# Altium PCB cw312_xc7a35t.PcbDoc (part 1 of 2)
Units mil, origin at the board's own origin, x right, y up, seen from the top; angles counter-clockwise.
Board outline 2310.04 x 2113.83 mil, 4 copper layers (Top Layer, Layer 1, Layer 2, Bottom Layer), stack 23.756 mil thick; 64 components, 69 nets, 577 pads, 221 vias.
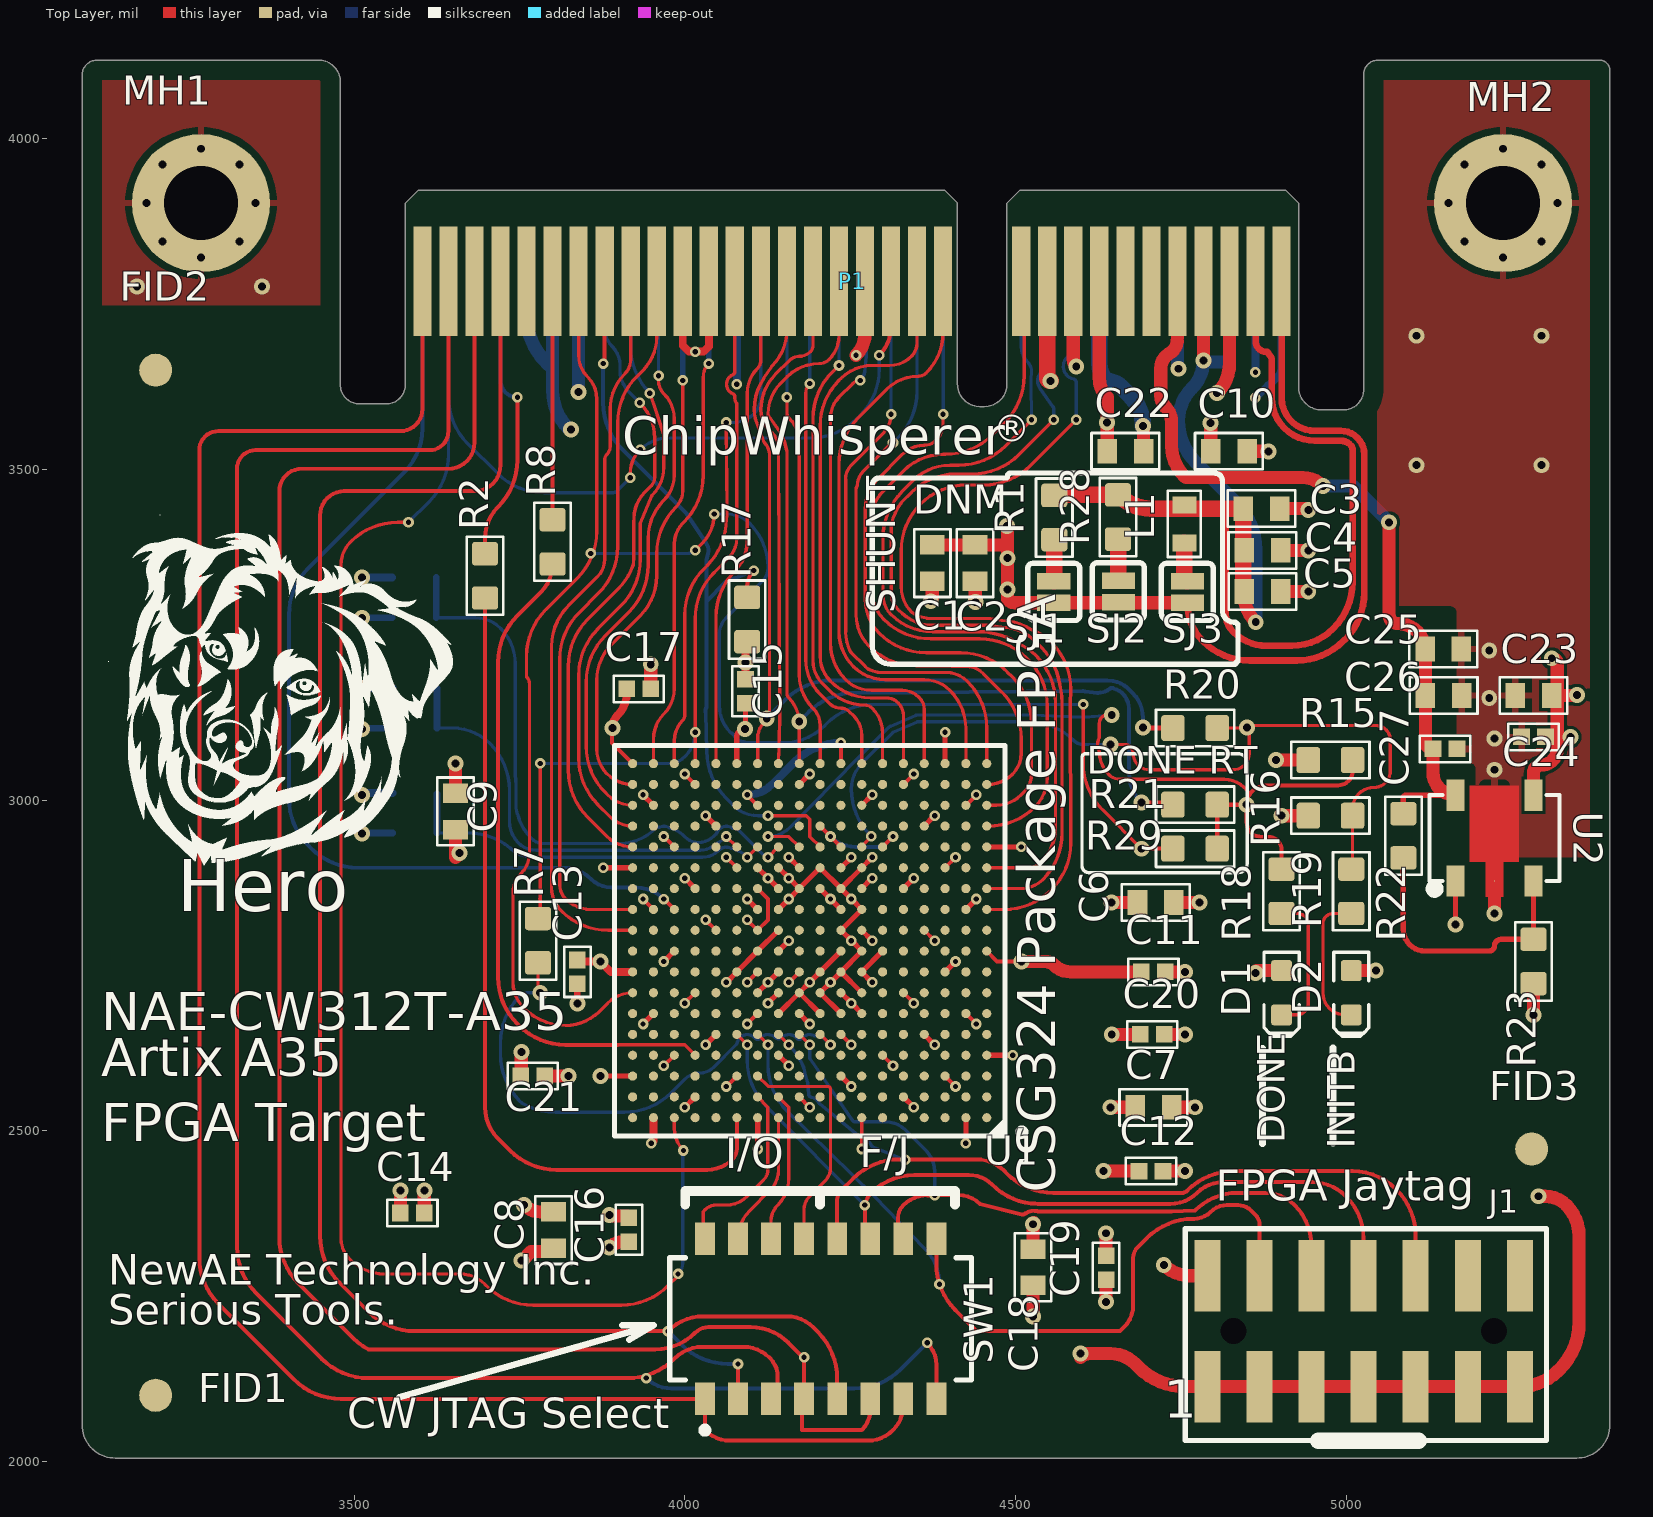
[diagram p0: Top Layer view]
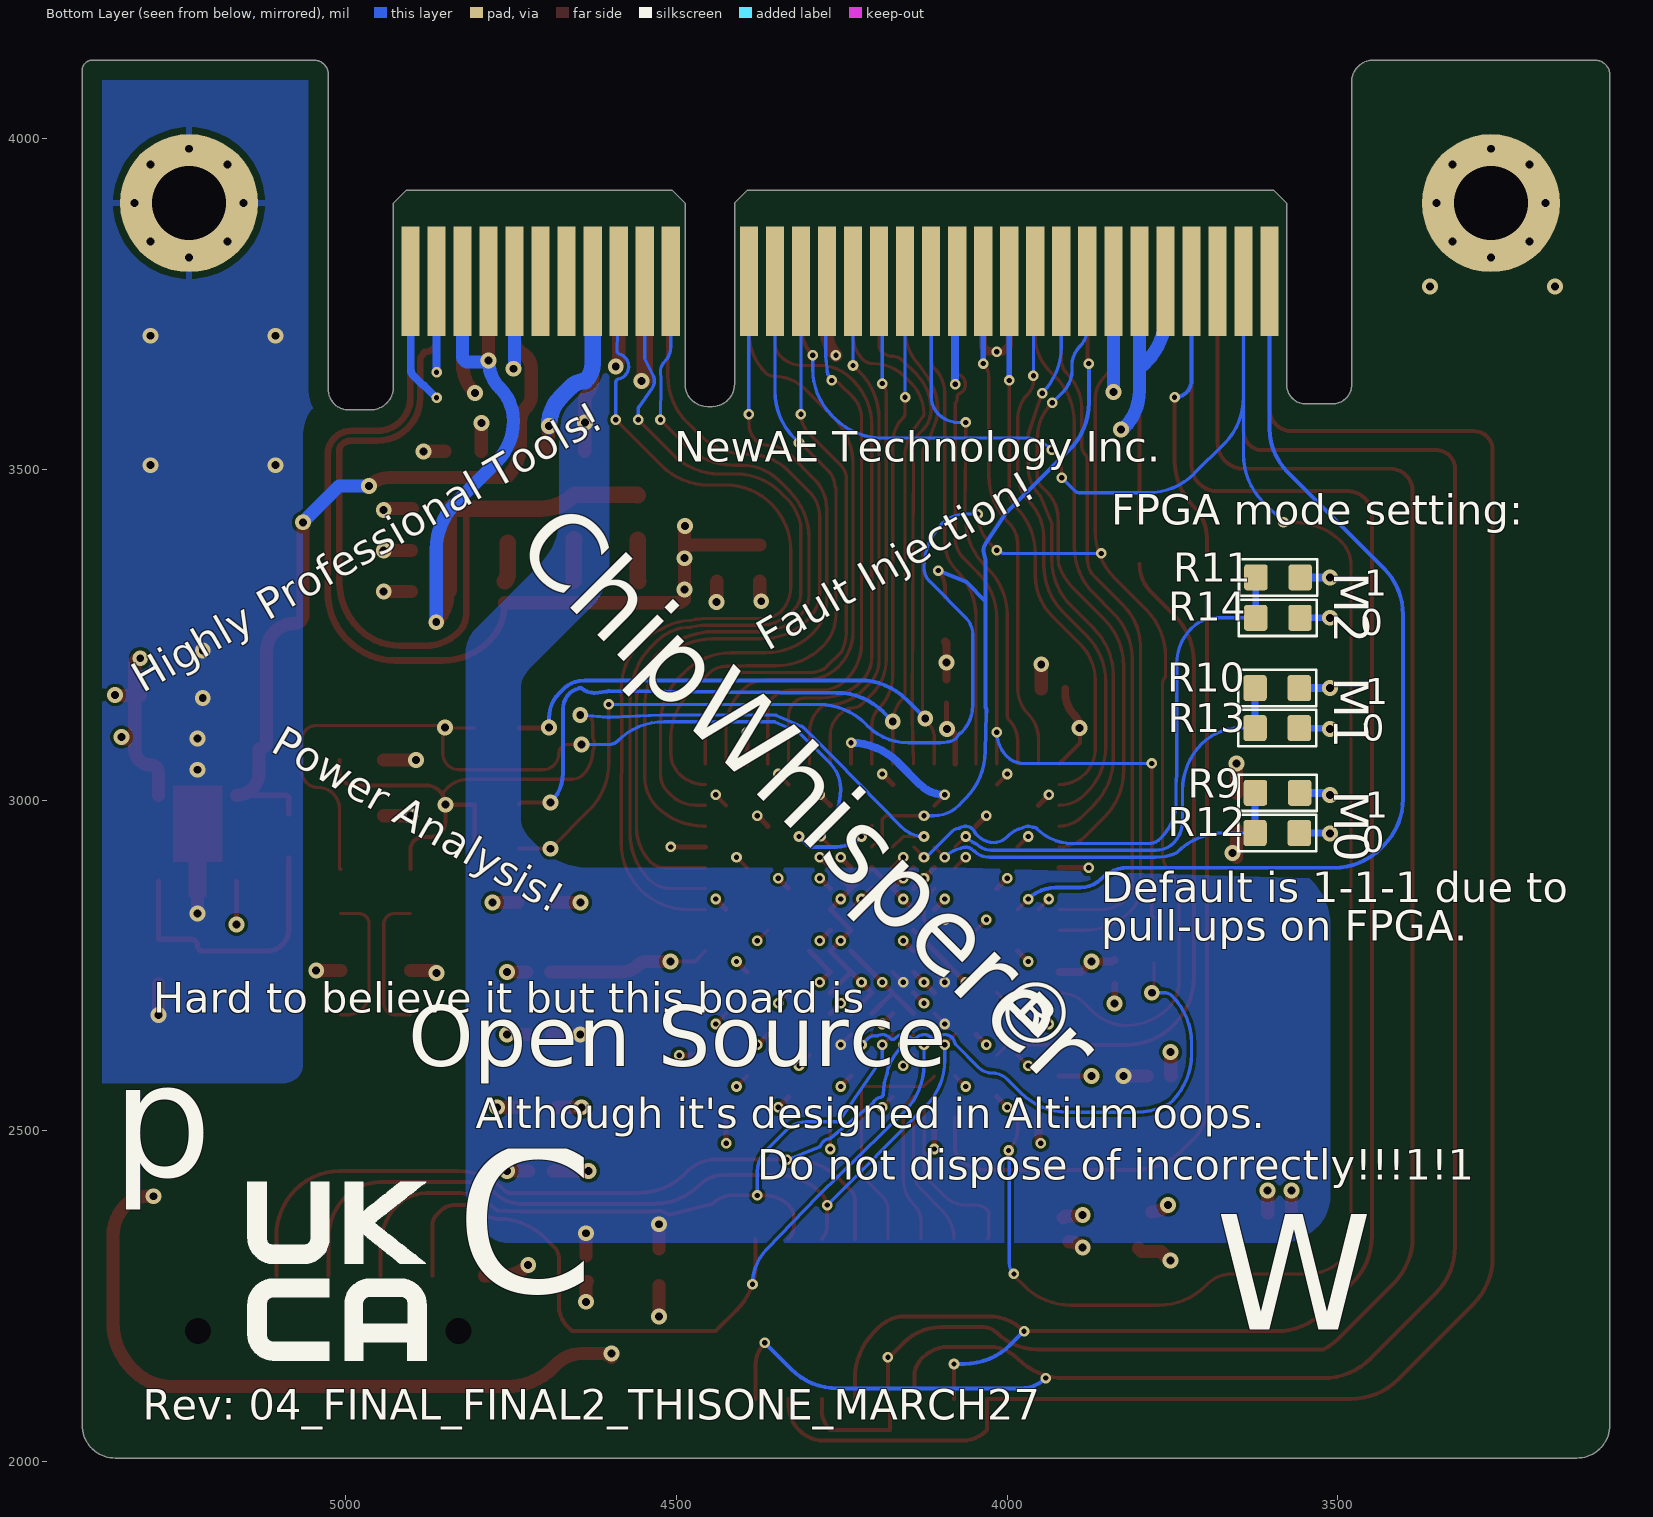
[diagram p1: Bottom Layer view, seen from below]
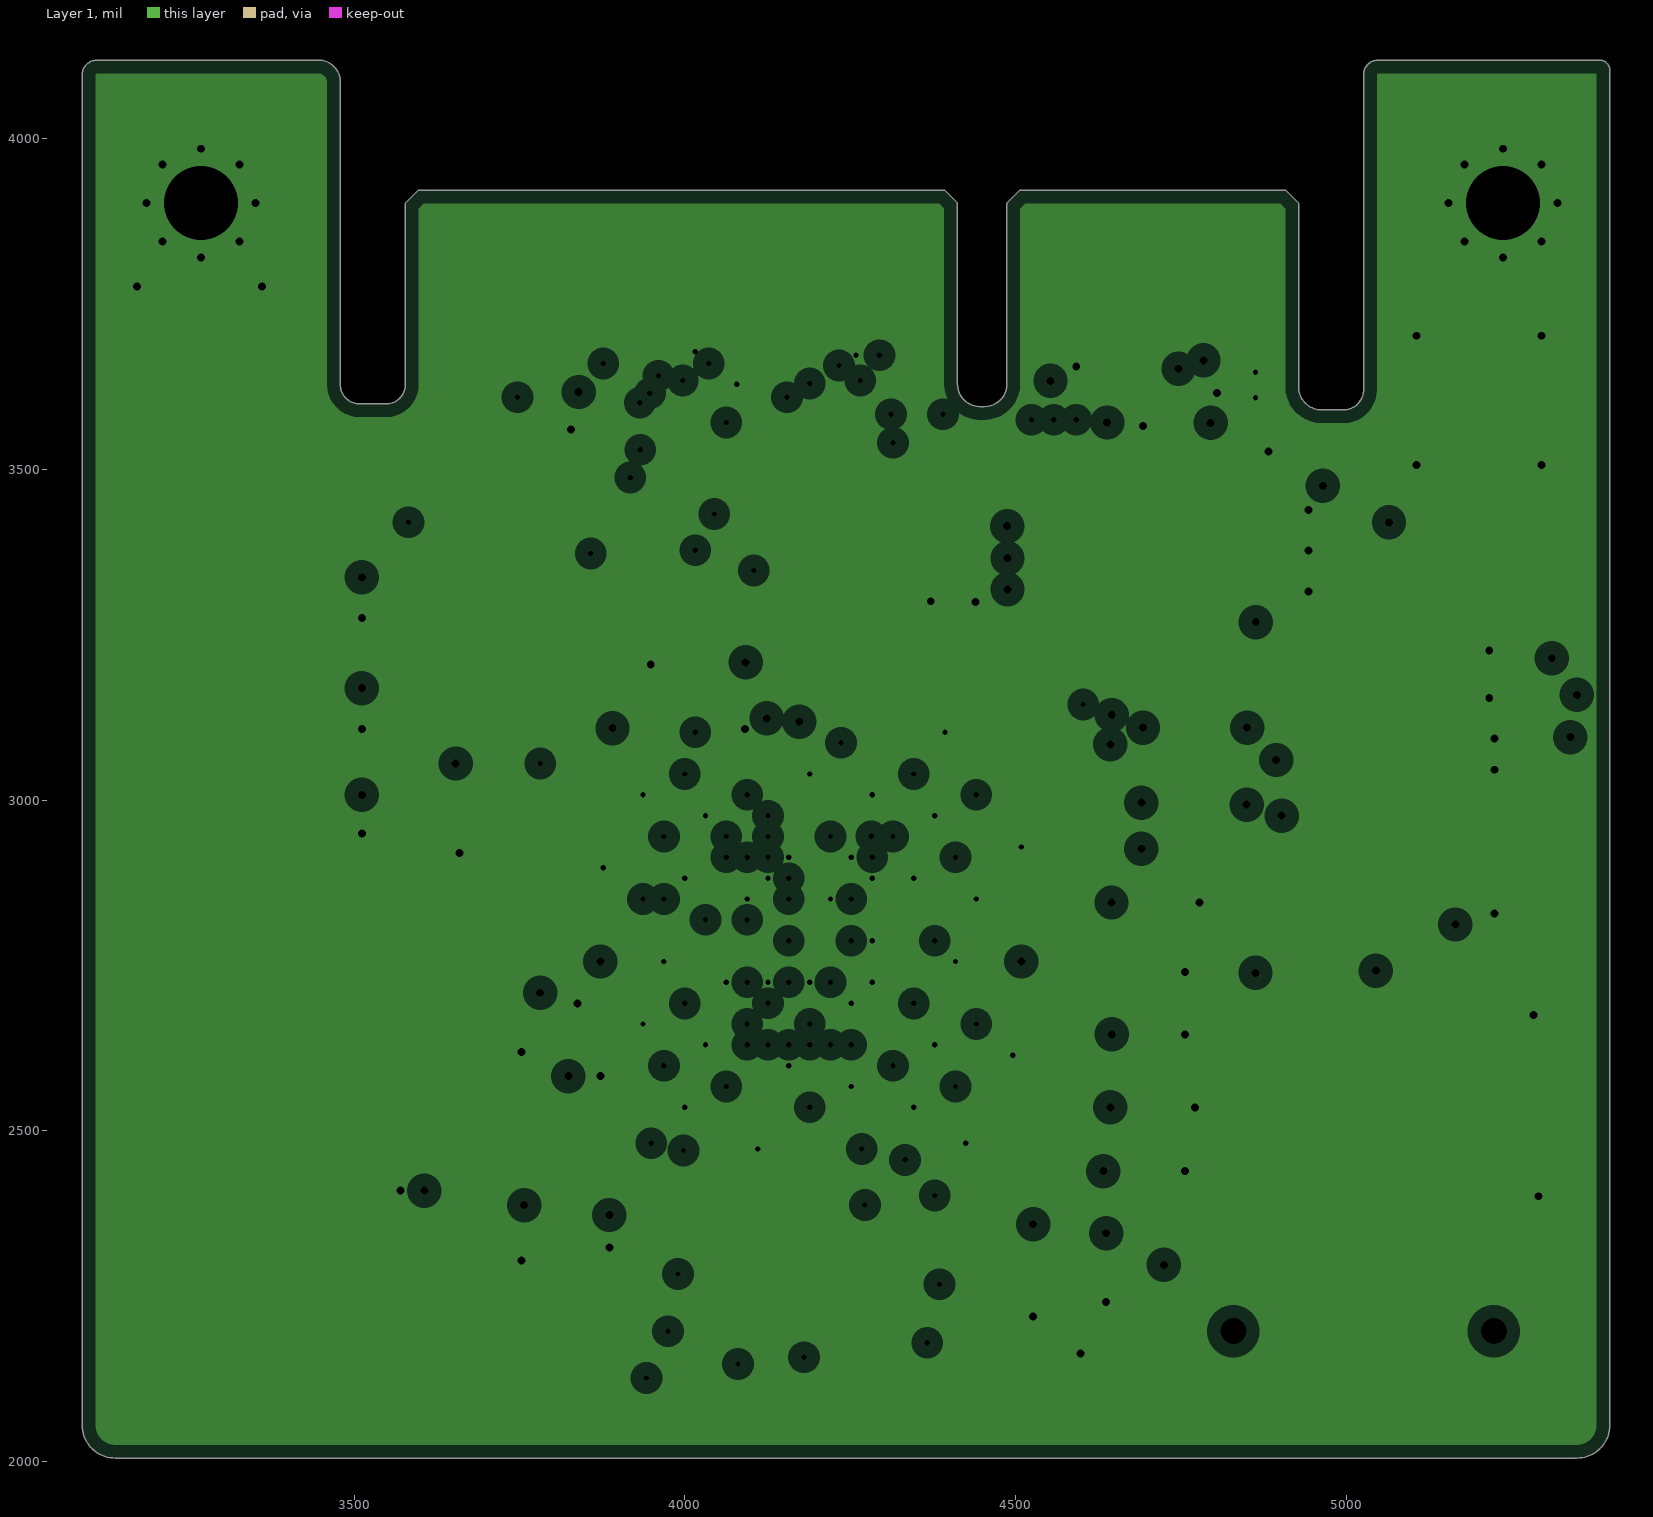
[diagram p2: Layer 1, clearances drawn from the general rule]
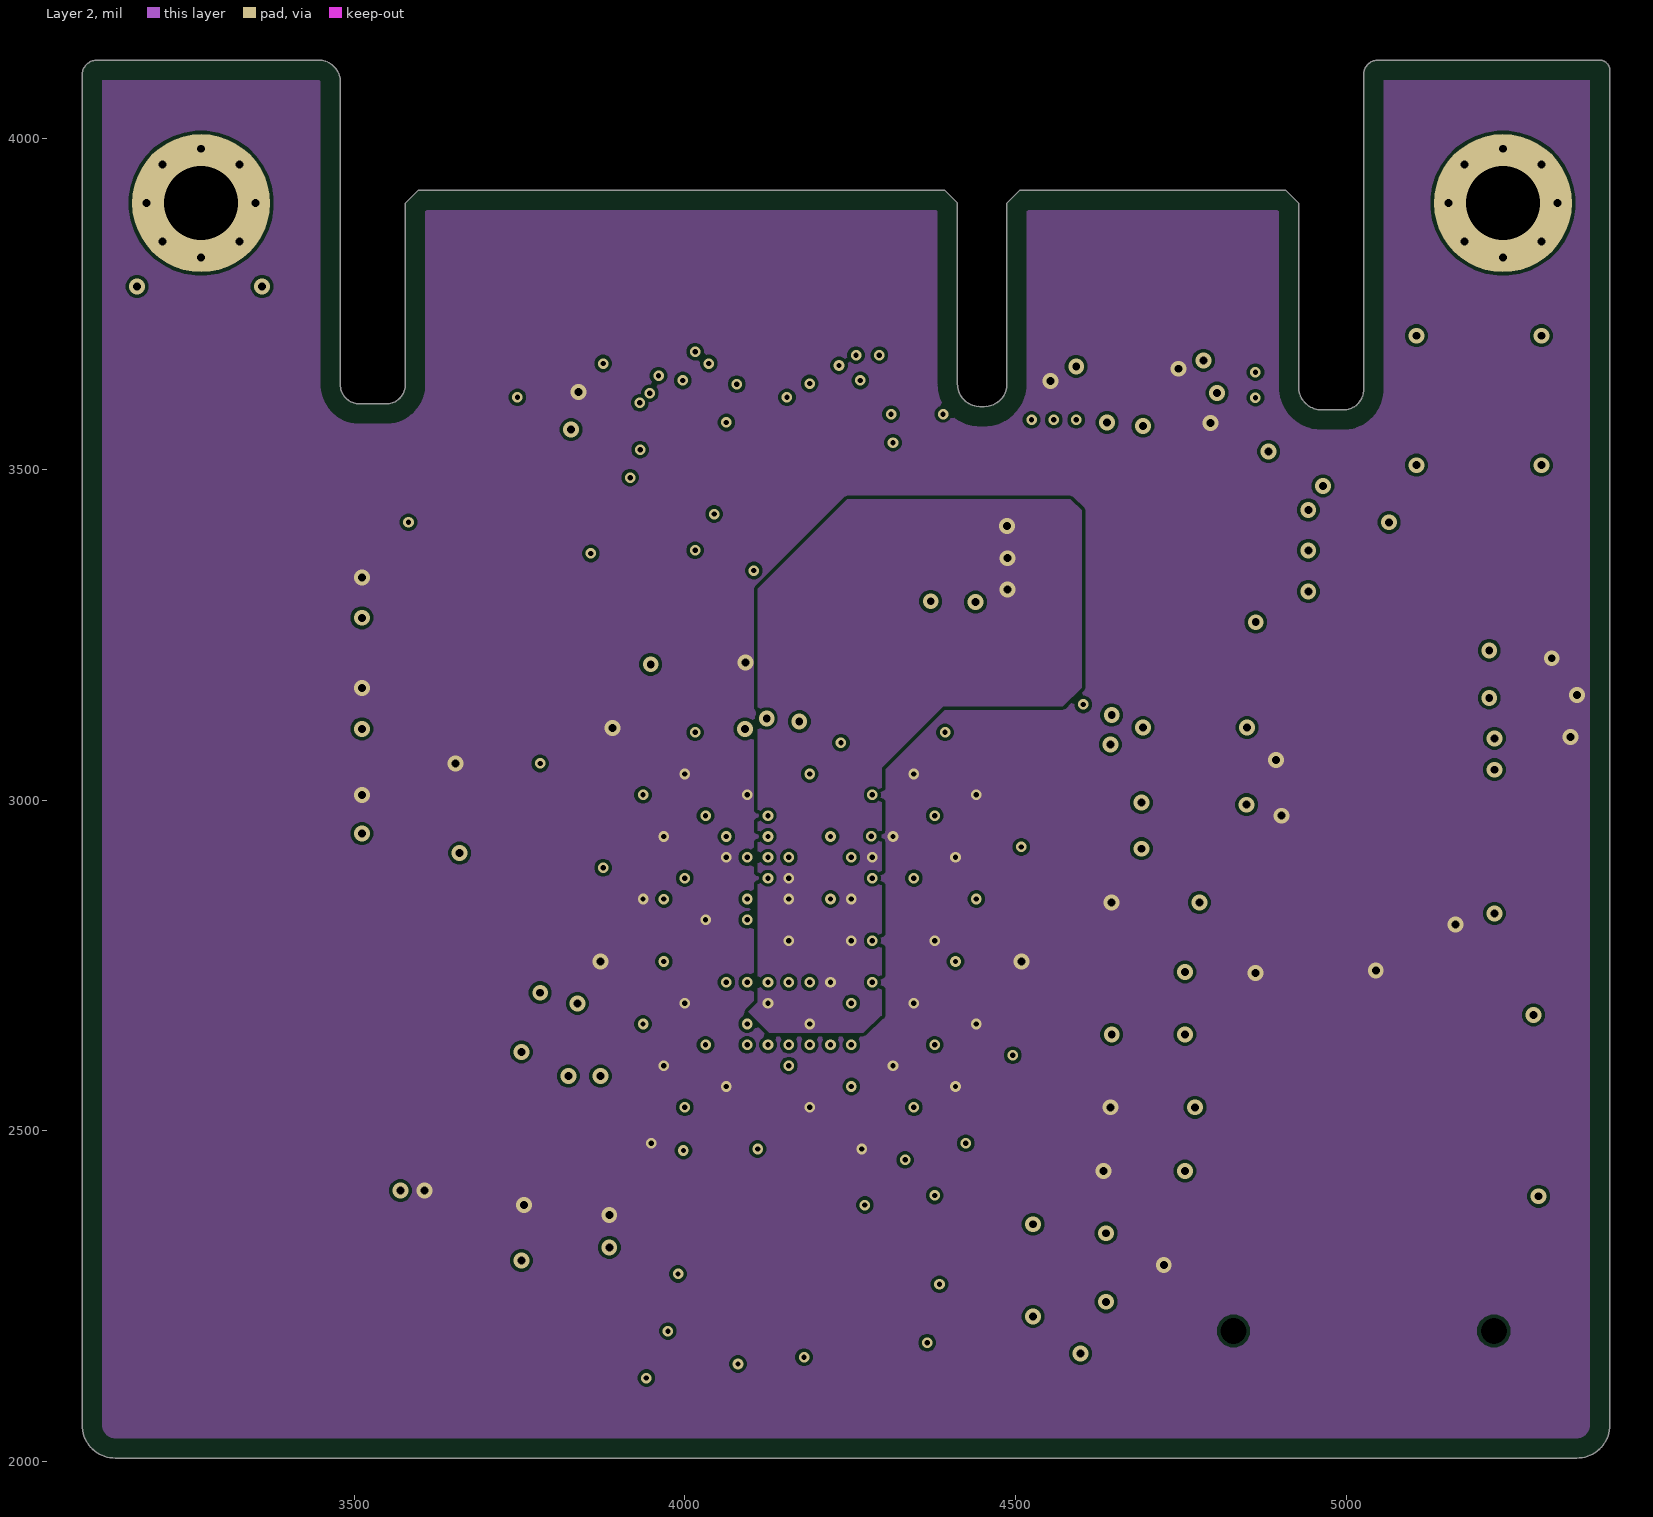
[diagram p3: Layer 2]
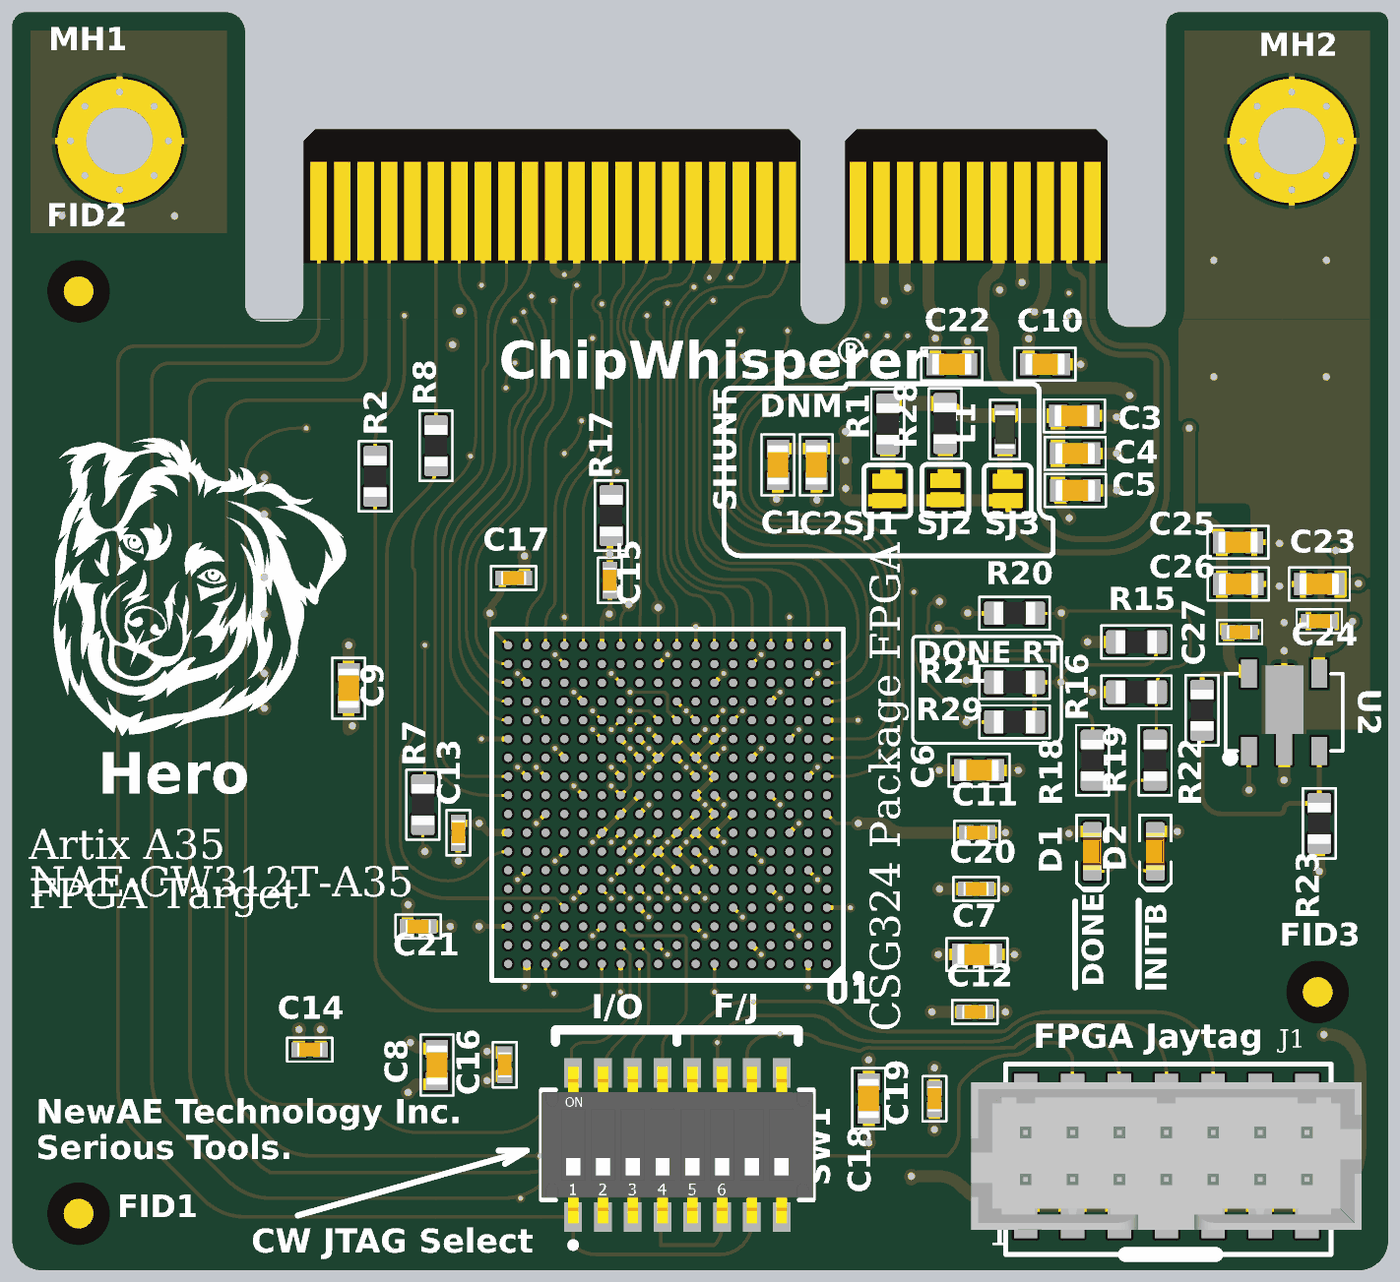
[diagram p5: 3D render of the assembled board from above, using the file's embedded part models]
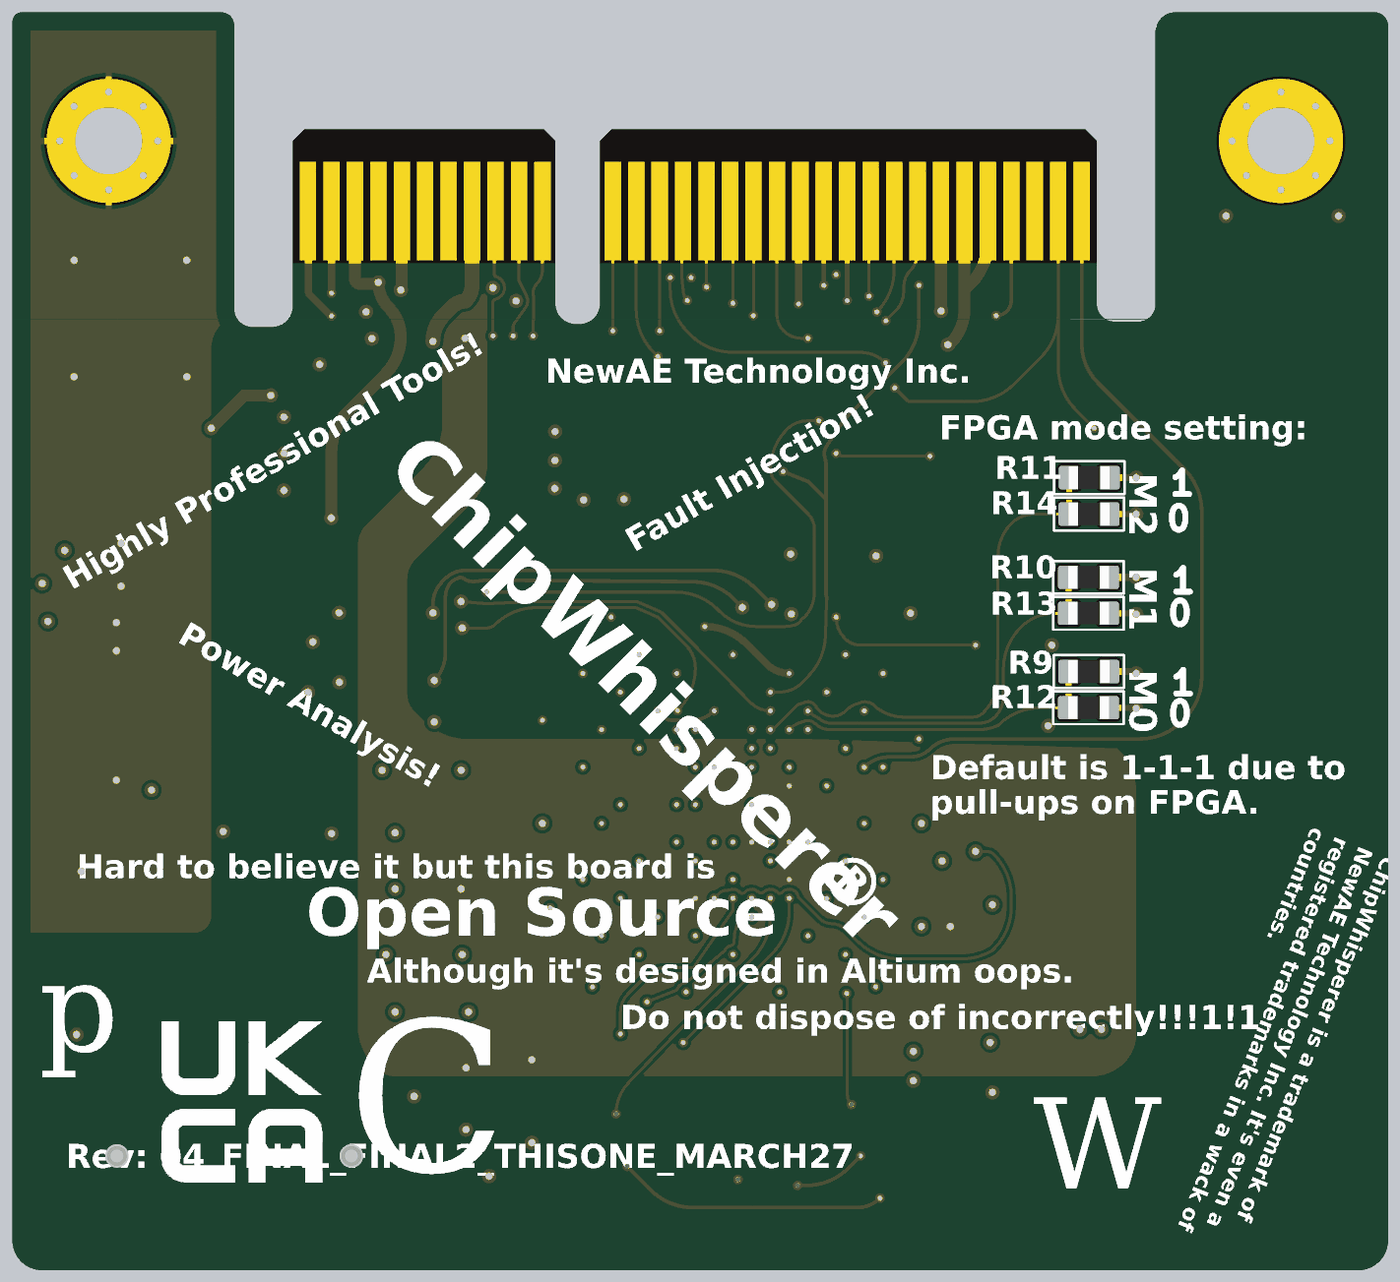
[diagram p6: 3D render of the assembled board from below, using the file's embedded part models]

## Layer stack, top to bottom
Top Solder: solder mask 0.4, Solder Resist, Dk 3.5
Top Layer: signal copper 1.4
Dielectric 2: prepreg 2.8, PP-006, Dk 4.1
Layer 1: plane copper 1.378, net GND
Dielectric 1: dielectric 12.6, FR-4, Dk 4.8
Layer 2: signal copper 1.378
Dielectric 3: prepreg 2.8, PP-006, Dk 4.1
Bottom Layer: signal copper 1.4
Bottom Solder: solder mask 0.4, Solder Resist, Dk 3.5

## Board outline
3088.86,2055 ccw(c3138.86,2055) 3138.86,2005 5348.9,2005 ccw(c5348.9,2055) 5398.9,2055 5398.9,4103.09 ccw(c5383.15,4103.09) 5383.15,4118.83 5048.5,4118.83 ccw(c5048.5,4096.91) 5026.58,4096.91 5026.58,3620.53 cw(c4996.05,3620.53) 4996.05,3590 4963.17,3590 cw(c4963.17,3625.02) 4928.15,3625.02 4928.15,3902.65 4908.46,3922.34 4506.89,3922.34 4487.2,3902.65 4487.2,3629.03 cw(c4453.17,3629.03) 4453.17,3595 4446.43,3595 cw(c4446.43,3629.03) 4412.4,3629.03 4412.4,3902.65 4392.72,3922.34 3597.44,3922.34 3577.76,3902.65 3577.76,3628.4 cw(c3548.35,3628.4) 3548.35,3599 3508.41,3599 cw(c3508.41,3628.08) 3479.33,3628.08 3479.33,4085.65 ccw(c3446.14,4085.65) 3446.14,4118.83 3111.5,4118.83 ccw(c3111.5,4096.2) 3088.86,4096.2

## Design rules (kind name [scope] priority, off if disabled: settings)
BoardOutlineClearance Silk_to_Outline [(OnLayer('Top Overlay'))] p1: gap=0 ignorepadtopadclearanceinfootprint=FALSE
BoardOutlineClearance [All] p2: gap=30 ignorepadtopadclearanceinfootprint=FALSE except(5: Track-OutlineEdge Track-CavityEdge Track-CutoutEdge Track-SplitBarrior Track-SplitContinuation SMDPad-OutlineEdge SMDPad-CavityEdge SMDPad-CutoutEdge SMDPad-SplitBarrior SMDPad-SplitContinuation)
Clearance [All] p1: gap=5 ignorepadtopadclearanceinfootprint=FALSE
HoleSize [All] p1: absolutevalues=TRUE maxlimit=200 minlimit=1 maxpercent=80.000 minpercent=20.000
MinimumSolderMaskSliver [All] p1: minsoldermaskwidth=5
PlaneClearance [All] p1: clearance=20
PlaneConnect PlaneConnect_MH [InComponent('MH1') or InComponent('MH2')] p1: planeconnectstyle=Direct reliefexpansion=20 reliefentries=4 reliefconductorwidth=10 reliefairgap=10
PlaneConnect PlaneConnect_viaDirect [IsVia] p2: planeconnectstyle=Direct reliefexpansion=20 reliefentries=4 reliefconductorwidth=10 reliefairgap=10
PlaneConnect [All] p3: planeconnectstyle=Relief reliefexpansion=20 reliefentries=4 reliefconductorwidth=10 reliefairgap=10
PolygonConnect PolygonConnect_viaDirect [All vs isVia] p1: connectstyle=Direct reliefconductorwidth=10 reliefentries=4 polygonreliefangle="90 Angle" airgapwidth=10
PolygonConnect [All] p2: connectstyle=Relief reliefconductorwidth=10 reliefentries=4 polygonreliefangle="90 Angle" airgapwidth=10
RoutingVias [All] p1: holewidth=8 width=16 viastyle="Through Hole" minholewidth=8 minwidth=16 maxholewidth=100 maxwidth=200 useviatemplates=TRUE viatemplateguid#1={D34D7AB9-3024-4146-83E3-B5961C51509C} viatemplateguid#2={C9B3ED78-813B-49D6-9E3A-DFB12ABB6989} viatemplateguid#3={154E6A83-3B22-4FBC-87DC-4FF27CD40F8F} viatemplatename#1=v61h30m0mx0 viatemplatename#2=v41h20 viatemplatename#3=v41h20m41
SilkToSilkClearance [All] p1: silktosilkclearance=5
SilkToSolderMaskClearance [IsPad] p1: minsilkscreentomaskgap=5 clearancetoexposedcopper=TRUE
SolderMaskExpansion [All] p1: expansion=4 istentingtop=FALSE
Width [All] p1: maxlimit=100 minlimit=5 preferedwidth=10 toplayer_prefwidth=6 midlayer1_minwidth=10 midlayer1_maxwidth=10 bottomlayer_prefwidth=6 minimp=50.000000 maximp=50.000000 favimp=50.000000
24 further rules are at their usual default settings.

## Classes and differential pairs
component class cw312_xc7a35t_fpga_cfg: D1 D2 J1 R7 R9 R10 R11 R12 R13 R14 R15 R16 R17 R18 R19
component class cw312_xc7A35t_fpga_io1: R2 R8 SW1 U1
component class cw312_xc7a35t_cardedge: C23 C24 C25 C26 C27 MH1 MH2 P1 R20 R21 R22 R23 R29 U2
component class cw312_xc7a35t_fpga_pwr: C1 C2 C3 C4 C5 C6 C7 C8 C9 C10 C11 C12 C13 C14 C15 C16 C17 C18 C19 C20 C21 C22 C? FID1 FID2 FID3 L1 R1 R28 SJ1 SJ2 SJ3

## Components (designator, comment, footprint, x,y, rotation, side; value= is the part's Value field where it differs from the comment)
C1 "DNM" CAPC0603_M 4374.4,3358.27 r270 top value=100n
C2 "DNM" CAPC0603_M 4438.77,3358.27 r270 top value=100n
C3 "100n" CAPC0603_M 4872.14,3440.7 r0 top
C4 "100n" CAPC0603_M 4873.44,3377.57 r0 top
C5 "2u2" CAPC0603_M 4873.81,3315.35 r0 top
C6 "2u2" CAPC0603_M 4712.23,2845.11 r0 top
C7 "2u2" CAPC0603_M 4708.66,2535.43 r0 top
C8 "2u2" CAPC0603_M 3801.73,2349.75 r270 top
C9 "2u2" CAPC0603_M 3653.54,2982.9 r270 top
C10 "2u2" CAPC0603_M 4822.83,3527.56 r0 top
C11 "100n" CAPC0402_M 4708.66,2740.16 r0 top
C12 "100n" CAPC0402_M 4705.03,2438.93 r0 top
C13 "100n" CAPC0402_M 3837.71,2740.16 r270 top
C14 "100n" CAPC0402_M 3588.19,2375.56 r180 top
C15 "100n" CAPC0402_M 4092,3164.47 r270 top
C16 "100n" CAPC0402_M 3915.5,2350.2 r270 top
C17 "100n" CAPC0402_M 3930.48,3168.11 r0 top
C18 "2u2" CAPC0603_M 4526.76,2293.58 r270 top
C19 "100n" CAPC0402_M 4637.18,2292.86 r270 top
C20 "100n" CAPC0402_M 4707,2645.67 r0 top
C21 "100n" CAPC0402_M 3770.31,2582.68 r180 top
C22 "2u2" CAPC0603_M 4666.34,3527.56 r0 top
C23 "2u2" CAPC0603_M 5283.46,3158.05 r180 top
C24 "100n" CAPC0402_M 5283.46,3095.61 r180 top
C25 "2u2" CAPC0603_M 5146.97,3228.27 r0 top
C26 "2u2" CAPC0603_M 5147.58,3158.05 r0 top
C27 "100n" CAPC0402_M 5149.61,3077.39 r0 top
D1 "LED, 0603, Red" LED-0603-RED 4902.56,2708.66 r270 top
D2 "LED, 0603, Red" LED-0603-RED 5007.87,2708.66 r270 top
FID1 "FIDU-ROUND-1.0MM" FIDU-ROUND-1.0mm#1 3195,2100 r0 top
FID2 "FIDU-ROUND-1.0MM" FIDU-ROUND-1.0mm#2 3210.57,3663.35 r0 top
FID3 "FIDU-ROUND-1.0MM" FIDU-ROUND-1.0mm#3 5265.67,2482.44 r0 top
J1 "87832-1420/XILINXJTAG" 87832-1420 5026.57,2197 r0 top
L1 "47n" IND_0603 4755.53,3417.52 r90 top
MH1 "4-40 MH, Tight Fit" MOUNT_#4_TIGHT 3268.7,3902.65 r0 top
MH2 "4-40 MH, Tight Fit" MOUNT_#4_TIGHT 5237.2,3902.65 r0 top
P1 "PCIeX4-GF-2D-1000-1K-O64" PCIeX4-GF-2D-1000-1K-O64 4528.54,3784.54 r180 top
R1 "4R7" RESC1608X55N 4558.79,3427.19 r90 top
R2 "10R" RESC1608X55N 3698,3339 r270 top
R7 "10R" RESC1608X55N 3778.21,2787.4 r270 top
R8 "10R" RESC1608X55N 3800.2,3390.39 r270 top
R9 "DNM RCHIP" RESC1608X55N 3591.28,3011.02 r180 bottom
R10 "DNM RCHIP" RESC1608X55N 3591.89,3169.37 r180 bottom
R11 "DNM RCHIP" RESC1608X55N 3590.58,3336.81 r180 bottom
R12 "DNM RCHIP" RESC1608X55N 3591.89,2950.27 r0 bottom
R13 "DNM RCHIP" RESC1608X55N 3591.89,3108.89 r0 bottom
R14 "DNM RCHIP" RESC1608X55N 3590.89,3275.59 r0 bottom
R15 "4k7" RESC1608X55N 4976.38,3060.63 r0 top
R16 "4k7" RESC1608X55N 4976.38,2976.38 r0 top
R17 "4k7" RESC1608X55N 4094.49,3272.99 r90 top
R18 "1k" RESC1608X55N 4902.56,2861.97 r270 top
R19 "1k" RESC1608X55N 5007.87,2861.97 r270 top
R20 "10k" RESC1608X55N 4771.65,3108.89 r180 top
R21 "DNM RCHIP" RESC1608X55N 4771.65,2992.98 r180 top
R22 "5k6" RESC1608X55N 5086.61,2946 r270 top
R23 "15k" RESC1608X55N 5283.46,2755.91 r270 top
R28 "0R5" RESC1608X55N 4655.07,3427.95 r90 top
R29 "1k" RESC1608X55N 4771.65,2926.43 r180 top
SJ1 "NO" SJ_2S_NO 4558,3314.66 r90 top
SJ2 "NO" SJ_2S_NO 4655.64,3315.68 r90 top
SJ3 "NO" SJ_2S_NO 4759.97,3314.66 r90 top
SW1 "A6H-8101-PM" FP-A6H-8101-PM-MFG 4205.52,2215.55 r0 top
U1 "XC7A35T-1CSG324C" CSG324 4188.98,2787.4 r180 top
U2 "AP7361C-Y5-13" SOT89-5 5165.35,2877.53 r0 top

## Footprints (in the part's own frame and the unit in brackets; to place one, negate y for a bottom-side part, rotate by r counter-clockwise, add the part's x,y. Pads: shape width x height; smd on the part's side, far side on the other; paste and mask are expansions set on the pad)
87832-1420 [mm] "87832-1420 (Molex)"
  rect 1x2.75 smd: 1(-6,-2.13) 2(-6,2.13) 3(-4,-2.13) 4(-4,2.13) 5(-2,-2.13) 6(-2,2.13) 7(0,-2.13) 8(0,2.13) 9(2,-2.13) 10(2,2.13) 11(4,-2.13) 12(4,2.13) 13(6,-2.13) 14(6,2.13)
  round 0 hole 1 unplated: MH1(-5,0) MH2(5,0)
  body extent -8.32,-3.15 8.33,3.15, height 7.58
CAPC0402_M [mm] "Chip Capacitor, 2-Leads, Body 0402, IPC Medium Density"
  rect 0.64x0.64 smd mask+0.06: 1(-0.46,0) 2(0.46,0)
  silkscreen extent -0.97,-0.51 0.97,0.51, body extent -0.55,-0.3 0.55,0.3, height 0.6
CAPC0603_M [mm]
  rect 0.75x0.95 smd: 1(-0.7,0) 2(0.7,0)
  silkscreen extent -1.3,-0.7 1.3,0.7, body extent -0.85,-0.45 0.85,0.45, height 0.9
CSG324 [mm] "BGA, 324-Balls, Body 15x15mm, Pitch 0.8mm"
  round 0.35 smd: A1(-6.8,6.8) A2(-6,6.8) A3(-5.2,6.8) A4(-4.4,6.8) A5(-3.6,6.8) A6(-2.8,6.8) A7(-2,6.8) A8(-1.2,6.8) A9(-0.4,6.8) A10(0.4,6.8) A11(1.2,6.8) A12(2,6.8) A13(2.8,6.8) A14(3.6,6.8) A15(4.4,6.8) A16(5.2,6.8) A17(6,6.8) A18(6.8,6.8) B1(-6.8,6) B2(-6,6) B3(-5.2,6) B4(-4.4,6) B5(-3.6,6) B6(-2.8,6) B7(-2,6) B8(-1.2,6) B9(-0.4,6) B10(0.4,6) B11(1.2,6) B12(2,6) B13(2.8,6) B14(3.6,6) B15(4.4,6) B16(5.2,6) B17(6,6) B18(6.8,6) C1(-6.8,5.2) C2(-6,5.2) C3(-5.2,5.2) C4(-4.4,5.2) C5(-3.6,5.2) C6(-2.8,5.2) C7(-2,5.2) C8(-1.2,5.2) C9(-0.4,5.2) C10(0.4,5.2) C11(1.2,5.2) C12(2,5.2) C13(2.8,5.2) C14(3.6,5.2) C15(4.4,5.2) C16(5.2,5.2) C17(6,5.2) C18(6.8,5.2) D1(-6.8,4.4) D2(-6,4.4) D3(-5.2,4.4) D4(-4.4,4.4) D5(-3.6,4.4) D6(-2.8,4.4) D7(-2,4.4) D8(-1.2,4.4) D9(-0.4,4.4) D10(0.4,4.4) D11(1.2,4.4) D12(2,4.4) D13(2.8,4.4) D14(3.6,4.4) D15(4.4,4.4) D16(5.2,4.4) D17(6,4.4) D18(6.8,4.4) E1(-6.8,3.6) E2(-6,3.6) E3(-5.2,3.6) E4(-4.4,3.6) E5(-3.6,3.6) E6(-2.8,3.6) E7(-2,3.6) E8(-1.2,3.6) E9(-0.4,3.6) E10(0.4,3.6) E11(1.2,3.6) E12(2,3.6) E13(2.8,3.6) E14(3.6,3.6) E15(4.4,3.6) E16(5.2,3.6) E17(6,3.6) E18(6.8,3.6) F1(-6.8,2.8) F2(-6,2.8) F3(-5.2,2.8) F4(-4.4,2.8) F5(-3.6,2.8) F6(-2.8,2.8) F7(-2,2.8) F8(-1.2,2.8) F9(-0.4,2.8) F10(0.4,2.8) F11(1.2,2.8) F12(2,2.8) F13(2.8,2.8) F14(3.6,2.8) F15(4.4,2.8) F16(5.2,2.8) F17(6,2.8) F18(6.8,2.8) G1(-6.8,2) G2(-6,2) G3(-5.2,2) G4(-4.4,2) G5(-3.6,2) G6(-2.8,2) G7(-2,2) G8(-1.2,2) G9(-0.4,2) G10(0.4,2) G11(1.2,2) G12(2,2) G13(2.8,2) G14(3.6,2) G15(4.4,2) G16(5.2,2) G17(6,2) G18(6.8,2) H1(-6.8,1.2) H2(-6,1.2) H3(-5.2,1.2) H4(-4.4,1.2) H5(-3.6,1.2) H6(-2.8,1.2) H7(-2,1.2) H8(-1.2,1.2) H9(-0.4,1.2) H10(0.4,1.2) H11(1.2,1.2) H12(2,1.2) H13(2.8,1.2) H14(3.6,1.2) H15(4.4,1.2) H16(5.2,1.2) H17(6,1.2) H18(6.8,1.2) J1(-6.8,0.4) J2(-6,0.4) J3(-5.2,0.4) J4(-4.4,0.4) J5(-3.6,0.4) J6(-2.8,0.4) J7(-2,0.4) J8(-1.2,0.4) J9(-0.4,0.4) J10(0.4,0.4) J11(1.2,0.4) J12(2,0.4) J13(2.8,0.4) J14(3.6,0.4) J15(4.4,0.4) J16(5.2,0.4) J17(6,0.4) J18(6.8,0.4) K1(-6.8,-0.4) K2(-6,-0.4) K3(-5.2,-0.4) K4(-4.4,-0.4) K5(-3.6,-0.4) K6(-2.8,-0.4) K7(-2,-0.4) K8(-1.2,-0.4) K9(-0.4,-0.4) K10(0.4,-0.4) K11(1.2,-0.4) K12(2,-0.4) K13(2.8,-0.4) K14(3.6,-0.4) K15(4.4,-0.4) K16(5.2,-0.4) K17(6,-0.4) K18(6.8,-0.4) L1(-6.8,-1.2) L2(-6,-1.2) L3(-5.2,-1.2) L4(-4.4,-1.2) L5(-3.6,-1.2) L6(-2.8,-1.2) L7(-2,-1.2) L8(-1.2,-1.2) L9(-0.4,-1.2) L10(0.4,-1.2) L11(1.2,-1.2) L12(2,-1.2) L13(2.8,-1.2) L14(3.6,-1.2) L15(4.4,-1.2) L16(5.2,-1.2) L17(6,-1.2) L18(6.8,-1.2) M1(-6.8,-2) M2(-6,-2) M3(-5.2,-2) M4(-4.4,-2) M5(-3.6,-2) M6(-2.8,-2) M7(-2,-2) M8(-1.2,-2) M9(-0.4,-2) M10(0.4,-2) M11(1.2,-2) M12(2,-2) M13(2.8,-2) M14(3.6,-2) M15(4.4,-2) M16(5.2,-2) M17(6,-2) M18(6.8,-2) N1(-6.8,-2.8) N2(-6,-2.8) N3(-5.2,-2.8) N4(-4.4,-2.8) N5(-3.6,-2.8) N6(-2.8,-2.8) N7(-2,-2.8) N8(-1.2,-2.8) N9(-0.4,-2.8) N10(0.4,-2.8) N11(1.2,-2.8) N12(2,-2.8) N13(2.8,-2.8) N14(3.6,-2.8) N15(4.4,-2.8) N16(5.2,-2.8) N17(6,-2.8) N18(6.8,-2.8) P1(-6.8,-3.6) P2(-6,-3.6) P3(-5.2,-3.6) P4(-4.4,-3.6) P5(-3.6,-3.6) P6(-2.8,-3.6) P7(-2,-3.6) P8(-1.2,-3.6) P9(-0.4,-3.6) P10(0.4,-3.6) P11(1.2,-3.6) P12(2,-3.6) P13(2.8,-3.6) P14(3.6,-3.6) P15(4.4,-3.6) P16(5.2,-3.6) P17(6,-3.6) P18(6.8,-3.6) R1(-6.8,-4.4) R2(-6,-4.4) R3(-5.2,-4.4) R4(-4.4,-4.4) R5(-3.6,-4.4) R6(-2.8,-4.4) R7(-2,-4.4) R8(-1.2,-4.4) R9(-0.4,-4.4) R10(0.4,-4.4) R11(1.2,-4.4) R12(2,-4.4) R13(2.8,-4.4) R14(3.6,-4.4) R15(4.4,-4.4) R16(5.2,-4.4) R17(6,-4.4) R18(6.8,-4.4) T1(-6.8,-5.2) T2(-6,-5.2) T3(-5.2,-5.2) T4(-4.4,-5.2) T5(-3.6,-5.2) T6(-2.8,-5.2) T7(-2,-5.2) T8(-1.2,-5.2) T9(-0.4,-5.2) T10(0.4,-5.2) T11(1.2,-5.2) T12(2,-5.2) T13(2.8,-5.2) T14(3.6,-5.2) T15(4.4,-5.2) T16(5.2,-5.2) T17(6,-5.2) T18(6.8,-5.2) U1(-6.8,-6) U2(-6,-6) U3(-5.2,-6) U4(-4.4,-6) U5(-3.6,-6) U6(-2.8,-6) U7(-2,-6) U8(-1.2,-6) U9(-0.4,-6) U10(0.4,-6) U11(1.2,-6) U12(2,-6) U13(2.8,-6) U14(3.6,-6) U15(4.4,-6) U16(5.2,-6) U17(6,-6) U18(6.8,-6) V1(-6.8,-6.8) V2(-6,-6.8) V3(-5.2,-6.8) V4(-4.4,-6.8) V5(-3.6,-6.8) V6(-2.8,-6.8) V7(-2,-6.8) V8(-1.2,-6.8) V9(-0.4,-6.8) V10(0.4,-6.8) V11(1.2,-6.8) V12(2,-6.8) V13(2.8,-6.8) V14(3.6,-6.8) V15(4.4,-6.8) V16(5.2,-6.8) V17(6,-6.8) V18(6.8,-6.8)
  silkscreen extent -8.27,-7.5 7.5,7.5, body extent -7.5,-7.5 7.5,7.5, height 1.5
FIDU-ROUND-1.0mm#1 [mil]
  round 50 smd paste-78.74 mask+27.56: M1(5,0)
FIDU-ROUND-1.0mm#2 [mil]
  round 50 smd paste-78.74 mask+27.56: M1(-10.57,-13.35)
FIDU-ROUND-1.0mm#3 [mil]
  round 50 smd paste-78.74 mask+27.56: M1(15,-10)
FP-A6H-8101-PM-MFG [mm]
  rect 0.76x1.25 smd paste+0 mask+0: 1(-4.445,-3.075) 2(-3.175,-3.075) 3(-1.905,-3.075) 4(-0.635,-3.075) 5(0.635,-3.075) 6(1.905,-3.075) 7(3.175,-3.075) 8(4.445,-3.075) 9(4.445,3.075) 10(3.175,3.075) 11(1.905,3.075) 12(0.635,3.075) 13(-0.635,3.075) 14(-1.905,3.075) 15(-3.175,3.075) 16(-4.445,3.075)
  silkscreen extent -5.79,-4.4 5.79,2.35, body extent -5.89,-3.8 5.89,3.8, height 0.25
IND_0603 [mm] "Chip Inductor, 2-Leads, Body 1.60x0.80mm, IPC Medium Density"
  rect 0.64x0.92 smd: 1(-0.73,0) 2(0.73,0)
  Top Layer pour cut-out: -0.686,0.457 0.838,0.457 0.838,-0.457 -0.686,-0.457
  silkscreen extent -1.27,-0.64 1.27,0.64, body extent -0.82,-0.43 0.82,0.43, height 0.9
LED-0603-RED [mm]
  round 0.254 on Mech15: 0(0,0)
  rrect25% 0.8x0.8 smd: A(-0.85,0) K(0.85,0)
  Top Layer pour cut-out: -0.5,0.5 0.5,0.5 0.5,-0.5 -0.5,-0.5
  silkscreen extent -1.55,-0.67 1.68,0.67, body extent -0.8,-0.4 0.8,0.4, height 0.75
MOUNT_#4_TIGHT [mil]
  round 14 hole 12: 1(-82.21,0) 1(-58.13,-58.13) 1(-58.13,58.13) 1(0,-82.21) 1(0,82.21) 1(58.13,-58.13) 1(58.13,58.13) 1(82.21,0)
  round 208.66 hole 112.2: 1(0,0)
PCIeX4-GF-2D-1000-1K-O64 [mm] "Golden finger, PCIeX4, Dual, Opposite, Pitch 1mm, 64-Position"
  rect 0.7x4.2 smd far side paste-1: A1(-9.5,0) A2(-8.5,0) A3(-7.5,0) A4(-6.5,0) A5(-5.5,0) A6(-4.5,0) A7(-3.5,0) A8(-2.5,0) A9(-1.5,0) A10(-0.5,0) A11(0.5,0) A12(3.5,0) A13(4.5,0) A14(5.5,0) A15(6.5,0) A16(7.5,0) A17(8.5,0) A18(9.5,0) A19(10.5,0) A20(11.5,0) A21(12.5,0) A22(13.5,0) A23(14.5,0) A24(15.5,0) A25(16.5,0) A26(17.5,0) A27(18.5,0) A28(19.5,0) A29(20.5,0) A30(21.5,0) A31(22.5,0) A32(23.5,0)
  rect 0.7x4.2 smd paste-1: B1(-9.5,0) B2(-8.5,0) B3(-7.5,0) B4(-6.5,0) B5(-5.5,0) B6(-4.5,0) B7(-3.5,0) B8(-2.5,0) B9(-1.5,0) B10(-0.5,0) B11(0.5,0) B12(3.5,0) B13(4.5,0) B14(5.5,0) B15(6.5,0) B16(7.5,0) B17(8.5,0) B18(9.5,0) B19(10.5,0) B20(11.5,0) B21(12.5,0) B22(13.5,0) B23(14.5,0) B24(15.5,0) B25(16.5,0) B26(17.5,0) B27(18.5,0) B28(19.5,0) B29(20.5,0) B30(21.5,0) B31(22.5,0) B32(23.5,0)
RESC1608X55N [mm] "Chip Resistor, Body 1.6x0.8mm, EIA 0603, IPC Medium Density"
  round 0.254 on Mech15: 0(0,0)
  rrect25% 0.9x1 smd: 1(-0.85,0) 2(0.85,0)
  Top Layer pour cut-out: -0.6,0.5 0.6,0.5 0.6,-0.5 -0.6,-0.5
  silkscreen extent -1.5,-0.7 1.5,0.7, body extent -0.87,-0.47 0.88,0.48, height 0.54
SJ_2S_NO [mil] "Solder Jumper, open (no paste)"
  rect 25x50 smd paste-393.7: 1(-16.22,0) 2(16.22,0)
  silkscreen extent -43,-39 43,39
SOT89-5 [mm]
  rect 0.68x1.2 smd: 1(0,0) 3(3,0) 4(3,3.3) 5(0,3.3)
  round 0.025 smd: 2(1.5,0)
  Top Layer region: 0.55,0.725 2.45,0.725 2.45,3.675 0.55,3.675
  Top Layer region: 1.16,-0.6 1.16,3.65 1.84,3.65 1.84,-0.6
  silkscreen extent -1,-0.44 4,3.3

## Part data
C1 C2: library part CCHIP-100n-0603, Case-EIA=0603, Case-Metric=1608, Manufacture 1=Kemet, Manufacture Part Number 1=C0603C104K5RACTU, Rated Voltage=50VDC, Supplier Part Number 1=399-5089-2-ND, Component Group=Capacitor, Component Type=Standard, Mounting Technology=SMT, Part Number=CCHIP-100n-0603, Pin Count=2, Supplier 1=Digi-Key
C3 C4: library part CCHIP-100n-0603, "100n, 0603", Case-EIA=0603, Case-Metric=1608, Manufacture 1=Kemet, Manufacture Part Number 1=C0603C104K5RACTU, Rated Voltage=50VDC, Supplier Part Number 1=399-5089-2-ND, Component Group=Capacitor, Component Type=Standard, Mounting Technology=SMT, Part Number=CCHIP-100n-0603, Pin Count=2, Supplier 1=Digi-Key
C5: library part CCHIP-2u2-0603, "2u2, 0603", Case-EIA=0603, Case-Metric=1608, Manufacture 1=Samsung, Manufacture Part Number 1=CL10B225KP8NNNC, Rated Voltage=10VDC, Supplier Part Number 1=1276-1134-2-ND, Component Group=Capacitor, Component Type=Standard, Mounting Technology=SMT, Part Number=CCHIP-2u2-0603, Pin Count=2, Supplier 1=Digi-Key
C6 C7 C8 C9 C10 C18 C22 C23 C25 C26: library part CCHIP-2u2-0603, "2u2, 0603", Case-EIA=0603, Case-Metric=1608, Manufacture 1=Samsung, Manufacture Part Number 1=CL10B225KP8NNNC, Rated Voltage=10VDC, Supplier Part Number 1=1276-1134-1-ND, Component Group=Capacitor, Component Type=Standard, Mounting Technology=SMT, Part Number=CCHIP-2u2-0603, Pin Count=2, Supplier 1=Digi-Key
C11 C12 C13 C14 C15 C16 C17 C19 C20 C21 C24 C27: library part CCHIP-100n-0402, "100n, 0402", Case-EIA=0402, Manufacture Part Number 1=CGA2B3X7R1V104K050BB, Supplier Part Number 1=445-6901-1-ND, Component Group=Capacitor, Component Type=Standard, Mounting Technology=SMT, Part Number=CCHIP-100n-0402, Pin Count=2, Supplier 1=Digi-Key
D1 D2: library part LEDCHIP_0603_RED, "Chip LED, Red", Manufacture 1=Kingbright, Manufacture Part Number 1=APT1608SRCPRV, Supplier Part Number 1=754-1122-1-ND, Component Group=Optical, Component Type=Standard, Mounting Technology=SMT, Part Number=LEDCHIP_0603_RED, Pin Count=2, PP Material Stack=15, PP Rotation=-90, Supplier 1=Digi-Key
FID1 FID2 FID3: "ROUND FIDUCIAL", Component Group="PCB Feature", Component Type="Standard (No BOM)", Part Number=FIDU-ROUND-1.0MM, Pin Count=0
J1: "Molex 14-pin SMD, JTAG Pinout", Manufacture 1=Molex, Manufacture 1 Part Number=87832-1420, Supplier Part Number 1=WM18641-ND, Supplier 1=Digi-Key
L1: library part LCHIP-47N-0603, "FIXED IND 47NH 380MA 290 MOHM", Case-EIA=0603, Case-Metric=1608, Manufacture 1="Murata Electronics North America", Manufacture Part Number 1=LQW18AN47NJ00D, Supplier Part Number 1=490-6895-1-ND, Tolerance=±5%, Component Group=Inductor, Component Type=Standard, Mounting Technology=SMT, Part Number=LCHIP-47N-0603, Pin Count=2, PP Material Stack=0, PP Rotation=0, Supplier 1=Digi-Key
MH1 MH2: library part MOUNT_#4_TIGHT, "Machine screw 4-40 Mounting Hole", Component Group=Mechanical, Component Type=Mechanical, Part Number=MOUNT_#4_TIGHT, Pin Count=1, PP Material Stack=0, PP Rotation=0
P1: library part CMP-0001-00031-2, "Golden finger, PCIeX4, Dual, Opposite, Pitch 1mm, 64-Position", ClassName="Edge Connector", Datasheet Version="rev2.0, Apr-2007", Mating Connector=Molex-87715-9106, Package Reference=PCIeX4-GF-2D-1000-1K-O64, Publisher=Altium
R1: library part RCHIP-4R7-0603, "4R7 res, 0603, 1%, 1/10W", Case-EIA=0603, Case-Metric=1608, Manufacture 1=Yageo, Manufacture Part Number 1=RC0603FR-074R7L, Rated Power=0.1W, Rated Voltage=75VDC, Supplier Part Number 1=YAG3371CT-ND, Temperature Range="-55C to 155C", Tolerance=1%, Component Group=Resistor, Component Type=Standard, Mounting Technology=SMT, Part Number=RCHIP-4R7-0603, Pin Count=2, Supplier 1=Digi-Key
R2 R7 R8: library part RCHIP-10R-0603, "10R res, 0603, 1%, 1/10W", Case-EIA=0603, Case-Metric=1608, Manufacture 1=Yageo, Manufacture Part Number 1=RC0603FR-0710RL, Rated Power=0.1W, Rated Voltage=75VDC, Supplier Part Number 1=311-10.0HRCT-ND, Temperature Range="-55C to 155C", Tolerance=1%, Component Group=Resistor, Component Type=Standard, Mounting Technology=SMT, Part Number=RCHIP-10R-0603, Pin Count=2, Supplier 1=Digi-Key
R9 R10 R11 R12 R13 R14 R21: library part RCHIP-DNM-0603, "Do Not Mount Resistor", Case-EIA=0603, Case-Metric=1608, Component Group=Resistor, Component Type=Standard, Mounting Technology=SMT, Part Number=RCHIP-DNM-0603, Pin Count=2
R15 R16 R17: library part RCHIP-4K7-0603, "4k7 res, 0603, 1%, 1/10W", Case-EIA=0603, Case-Metric=1608, Manufacture 1=Yageo, Manufacture Part Number 1=RC0603FR-074K7L, Rated Power=0.1W, Rated Voltage=75VDC, Supplier Part Number 1=311-4.70KHRCT-ND, Temperature Range="-55C to 155C", Tolerance=1%, Component Group=Resistor, Component Type=Standard, Mounting Technology=SMT, Part Number=RCHIP-4K7-0603, Pin Count=2, Supplier 1=Digi-Key
R18 R19 R29: library part RCHIP-1K-0603, "1k res, 0603, 1%, 1/10W", Case-EIA=0603, Case-Metric=1608, Manufacture 1=Yageo, Manufacture Part Number 1=RC0603FR-071KL, Rated Power=0.1W, Rated Voltage=75VDC, Supplier Part Number 1=311-1.00KHRCT-ND, Temperature Range="-55C to 155C", Tolerance=1%, Component Group=Resistor, Component Type=Standard, Mounting Technology=SMT, Part Number=RCHIP-1K-0603, Pin Count=2, Supplier 1=Digi-Key
R20: library part RCHIP-10K-0603, "10k res, 0603, 1%, 1/10W", Case-EIA=0603, Case-Metric=1608, Manufacture 1=Yageo, Manufacture Part Number 1=RC0603FR-0710KL, Rated Power=0.1W, Rated Voltage=75VDC, Supplier Part Number 1=311-10.0KHRCT-ND, Temperature Range="-55C to 155C", Tolerance=1%, Component Group=Resistor, Component Type=Standard, Mounting Technology=SMT, Part Number=RCHIP-10K-0603, Pin Count=2, Supplier 1=Digi-Key
R22: library part RCHIP-5K6-0603, "5k6 res, 0603, 1%, 1/10W", Case-EIA=0603, Case-Metric=1608, Manufacture 1=Yageo, Manufacture Part Number 1=RC0603FR-075K6L, Rated Power=0.1W, Rated Voltage=75VDC, Supplier Part Number 1=311-5.60KHRCT-ND, Temperature Range="-55C to 155C", Tolerance=1%, Component Group=Resistor, Component Type=Standard, Mounting Technology=SMT, Part Number=RCHIP-5K6-0603, Pin Count=2, Supplier 1=Digi-Key
R23: library part RCHIP-15k-0603, "15k res, 0603, 1%, 1/10W", Case-EIA=0603, Case-Metric=1608, Manufacture 1=Yageo, Manufacture Part Number 1=RC0603FR-0715KL, Part Number=RCHIP-15K-0603, Rated Power=0.1W, Rated Voltage=75VDC, Supplier Part Number 1=311-15.0KHRCT-ND, Temperature Range="-55C to 155C", Tolerance=1%, Component Group=Resistor, Component Type=Standard, Mounting Technology=SMT, Pin Count=2, Supplier 1=Digi-Key
R28: library part RCHIP-0R500-0603, "0R500 res, 0603, 1%, 1/10W", Case-EIA=0603, Case-Metric=1608, Manufacture 1=Yageo, Manufacture Part Number 1=RL0603FR-070R5L, Rated Power=0.1W, Rated Voltage=75VDC, Supplier Part Number 1=311-.5QCT-ND, Temperature Range="-55C to 155C", Tolerance=1%, Component Group=Resistor, Component Type=Standard, Mounting Technology=SMT, Part Number=RCHIP-0R500-0603, Pin Count=2, Supplier 1=Digi-Key
SJ1 SJ2 SJ3: library part SJ_2S_NO, "Solder Jumper, NO", Component Group="PCB Feature", Component Type="Standard (No BOM)", Mounting Technology=COPPER, Part Number=SJ_2S_NO, Pin Count=2
SW1: library part CMP-08827-000045-1, "SWITCH SLIDE DIP SPST 25MA 24V", Current Rating=25mA, Max Operating Temperature=70°C, Max Voltage Rating (DC)=24V, Min Operating Temperature=-20°C, Package Quantity=4000, Actuator Type="Slide (Standard)", Depth=6.7mm, Electrical Life=1000Cycles, Length=0.448inch, Max Current Rating=25mA, Mechanical Life=1000Cycles, Mount="Surface Mount", Number of Positions=8, Orientation=Straight, Packaging="Tape and Reel", Pitch=0.05inch, Radiation Hardening=No, Series=A6H, Termination="Gull Wing", Throw Configuration=SPST, Voltage Rating (DC)=24V, Washable=No
U1: library part CMP-0383-00012-1, "Artix-7 FPGA, 210 User I/Os, 0 GTP, 324-Ball BGA, Speed Grade 1, Commercial Grade, Pb-Free", Manufacturer=Xilinx, Operating Temperature Range=Commercial, Available User I/O=210, CMTs=5, ComponentLink1Description="Manufacturer URL", ComponentLink1URL=http://www.xilinx.com/, ComponentLink2Description=Datasheet, ComponentLink2URL=http://www.xilinx.com/support/documentation/data_sheets/ds180_7Series_Overview.pdf, ComponentLink3Description=Pinout, ComponentLink3URL=http://www.xilinx.com/support/documentation/user_guides/ug475_7Series_Pkg_Pinout.pdf, ComponentLink4Description="Package Specification", ComponentLink4URL=http://www.xilinx.com/support/documentation/user_guides/ug475_7Series_Pkg_Pinout.pdf, DatasheetVersion="Rev. 1.15", GTP=0, Logic Cells=33280, Maximum Distributed RAM="400 Kb", Mounting Technology="Surface Mount", PackageDescription="324-Ball Wire-Bond Chip-Scale BGA, Body 15 x 15 mm, Pitch 0.8 mm", PackageReference=CSG-324, PackageVersion="Rev. 1.11", PartNumber=XC7A35T-1CSG324C, Speed Grades=1, Total Block RAM="1800 Kb"
U2: "Regulator, Adj, LDO, 1A", Manufacture 1="Diodes Inc", Supplier Part Number 1=AP7361C-Y5-13DICT-ND, Component Group="Analog IC", Component Type=Standard, Manufacture Part Number 1=AP7361C-Y5-13, Part Number=AP7361C-Y5-13, Pin Count=5, PP Material Stack=0, PP Rotation=0, PP Rotation1=0, Supplier 1=Digi-Key

## Via types
v1: diameter 16, hole 8, Top Layer to Bottom Layer, tented both sides, 129 vias
v2: diameter 24, hole 12, Top Layer to Bottom Layer, tented both sides, 92 vias

## Nets (pads, with @x,y where several pads share a name; then routed paths per layer and width w, separated by ;. In a path a pad name is that pad's centre, name@x,y a point inside that pad or via, vN(x,y) a via of type N, cw(c..) or ccw(c..) an arc to the next point about the centre after c; other vN are vias at no path point)
BOOT_MODE: P1.B25 R17.2 U1.P9 | length 1164.7
  Top Layer w5: P1.B25@3878.94,3706.12 P1.B25@3878.94,3784.54 ; v1(4125.98,2976.38) 4184,2976.38 4189.09,2971.29 4189.09,2944.77 U1.P9@4204.72,2929.13
  Top Layer w6: v1(3876.69,3660) ccw(c3871.25,3665.43) 3878.94,3665.43 P1.B25@3878.94,3706.12 ; R17.2@4094.49,3306.45 4094.49,3322.77 cw(c4128.82,3322.77) v1(4104.54,3347.05)
  Bottom Layer w5: 4031.74,3132.87 ccw(c4047.24,3132.78) 4031.75,3132.34 4033.45,3073.8 cw(c4028.45,3073.65) 4033.45,3073.65 ccw(c4133.45,3073.65) 4062.74,3002.94 4069.62,2996.06 ccw(c4097.16,3016.29) 4073,2992.13 ccw(c4111.02,3030.14) 4111.02,2976.38 v1(4125.98,2976.38)
  Bottom Layer w6: v1(3876.69,3660) 3876.69,3600.56 ccw(c3976.69,3600.56) 3905.97,3529.84 4003.36,3432.46 ; 4003.38,3432.44 cw(c3999.12,3428.21) 4004.13,3431.52 4032.44,3388.59 cw(c4015.75,3377.57) 4035.2,3372.92 4032.85,3363.11 ccw(c4038.69,3361.71) 4032.69,3361.71 4032.69,3300.59 ; 4031.24,3132.87 cw(c4047.24,3132.78) 4032.3,3138.51 ccw(c4026.69,3140.62) 4032.69,3140.58 4032.69,3300.59 ; v1(4104.54,3347.05) 4063.16,3330.39 ccw(c4065.4,3324.82) 4061.16,3329.07 4032.69,3300.59
CLKIN: P1.B27 R8.1 | length 360.7
  Top Layer w6: R8.1@3800.2,3423.86 P1.B27@3800.2,3784.54
CLKOUT: P1.A29 R2.1 | length 439.8
  Top Layer w6: R2.1@3698,3372.46 3698,3395.7 cw(c3765.3,3395.7) 3717.71,3443.29 ccw(c3647,3514) 3747,3514 v1(3747,3609)
  Bottom Layer w6: P1.A29@3721.46,3784.54 3721.46,3634.54 ccw(c3747,3634.54) v1(3747,3609)
CS: P1.B26 R29.2 U1.G18 | length 2829.8
  Top Layer w5: P1.B26@3839.57,3784.54 3839.57,3672.77 ccw(c3886.42,3672.77) 3853.29,3639.64 cw(c3820.19,3606.54) 3867,3606.54 3867,3406.4 cw(c3767,3406.4) 3837.71,3335.69 3790.12,3288.1 ccw(c3860.83,3217.39) 3760.83,3217.39 3760.83,3186.34 cw(c3750.25,3175.76) 3765.21,3175.76 3765.21,2919.81 cw(c3720.81,2919.81) 3752.2,2888.41 ccw(c3780.67,2859.95) 3740.41,2859.95 3740.41,2724.83 ccw(c3796.25,2724.83) 3756.77,2685.35 ccw(c3819.88,2748.47) 3819.88,2659.21 ccw(c3819.88,2730.83) 3870.53,2680.19 3883.26,2692.92 cw(c3921.26,2654.92) U1.G18@3921.26,2708.66 ; v1(4015.75,3377.57) 4026.11,3387.93 ccw(c3981.62,3432.42) v1(4044.54,3432.42) ; v1(4602.63,3144.59) 4602.63,3055.78 ccw(c4702.63,3055.78) 4631.92,2985.07 v2(4690.55,2926.43)
  Top Layer w6: v2(4690.55,2926.43) R29.2@4738.19,2926.43
  Bottom Layer w5: v1(3858.08,3372.92) 4004.51,3372.92 ccw(c4004.51,3388.81) v1(4015.75,3377.57) ; v1(4044.54,3432.42) 4064.12,3432.42 cw(c4064.12,3384.31) 4098.14,3418.33 cw(c4030.92,3351.11) 4125.98,3351.11 cw(c4097.12,3351.11) 4117.53,3330.7 4062.74,3275.91 ccw(c4088.05,3250.59) 4052.25,3250.59 4052.25,3143.54 ccw(c4111.49,3143.54) 4069.6,3101.65 cw(c4069.06,3096.68) 4073.53,3098.91 ccw(c4091,3107.58) 4088.66,3088.22 cw(c4088.03,3083.26) 4089.2,3088.12 ccw(c4101.59,3138.14) 4101.59,3086.61 4150.12,3086.61 ccw(c4150.12,3172.55) 4210.89,3111.79 4214.4,3115.3 cw(c4285.11,3044.59) 4285.11,3144.59 v1(4602.63,3144.59)
FILT_HP: C3.1 C4.1 C5.1 L1.2 P1.A3 P1.B2 P1.B4 R1.2 R28.2 | length 2199.7
  Top Layer w10: 4818.22,3440.7 4818.22,3280.83 ccw(c4855.52,3280.83) 4829.15,3254.46 ccw(c4880.31,3305.63) 4880.31,3233.27 4917.88,3233.27 ccw(c4917.88,3321.9) 4980.55,3259.23 ccw(c4909.84,3329.94) 5009.84,3329.94 ; P1.B2@4863.19,3784.54 4863.19,3693.76 ccw(c4878.96,3693.76) 4878.96,3677.99 cw(c4878.96,3674.07) 4882.88,3674.07 cw(c4877.56,3665.6) 4887.56,3665.6 4887.56,3608.49 ccw(c4952.76,3608.49) 4952.76,3543.29 4992.08,3543.29 cw(c4992.08,3522.81) 5007.29,3536.52 cw(c4999.84,3529.85) 5009.84,3529.89 5009.84,3329.94 ; 5009.84,3347.05 5009.84,3329.94
  Top Layer w20: v2(4784.45,3664.87) P1.B4@4784.45,3784.54 ; C5.1@4846.25,3315.35 4846.25,3310.52 ccw(c4905.02,3310.52) v2(4863.46,3268.97)
  Top Layer w25: R1.2@4558.79,3460.66 cw(c4560.63,3458.82) 4560.63,3461.42 R28.2@4655.07,3461.42 ccw(c4705.09,3511.44) 4705.09,3440.7 4818.22,3440.7 C3.1@4844.58,3440.7 4844.58,3319.39 ccw(c4850.29,3319.39) C5.1@4846.25,3315.35 ; C3.1@4838.11,3442.48 cw(c4838.9,3442.48) C3.1@4838.9,3443.26
  Bottom Layer w20: P1.A3@4823.82,3784.54 4823.82,3671.29 cw(c4814.81,3671.29) 4814.81,3662.28 4787.04,3662.28 cw(c4787.04,3664.87) v2(4784.45,3664.87) cw(c4724.96,3664.87) 4767.02,3622.8 ccw(c4816.07,3573.76) 4746.71,3573.76 ccw(c4836.05,3573.76) 4772.88,3510.59 4834.18,3449.29 cw(c4763.46,3378.58) 4863.46,3378.58 v2(4863.46,3268.97) cw(c4861.88,3268.97) v2@4863,3267.85
FILTIN: C25.1 C26.1 C27.1 P1.B5 R22.1 U2.5 | length 1224.7
  Top Layer w8: R22.1@5086.61,2979.46 5086.61,3003.52 cw(c5090.55,3003.52) 5090.55,3007.45 U2.5@5165.35,3007.45
  Top Layer w20: P1.B5@4745.08,3784.54 4745.08,3699.51 cw(c4704.75,3699.51) 4743.22,3687.41 cw(c4724.16,3693.46) 4733.81,3675.95 ccw(c4746.71,3652.23) 4730.99,3674.18 ccw(c4746.71,3652.23) 4719.91,3648.91 4719.91,3611.11 ccw(c4743.33,3611.11) 4726.77,3594.56 cw(c4703.96,3571.75) 4736.22,3571.75 4736.22,3535.66 ccw(c4800.61,3535.66) 4755.08,3490.13 4755.53,3489.68 ccw(c4760.6,3494.76) 4760.6,3487.58 4934.65,3487.58 cw(c4934.65,3444.63) v2(4965.03,3475) ; v2(5065,3420) 5065,3280 ccw(c5078,3280) 5078,3267 cw(c5078,3224.98) 5120.02,3224.98 C26.1@5120.02,3158.05 5120.02,3088.86 ccw(c5131.5,3088.86) C27.1@5131.5,3077.39 5131.5,3041.31 ccw(c5165.35,3041.31) U2.5@5165.35,3007.45
  Bottom Layer w20: v2(4965.03,3475) 5010,3475 v2(5065,3420)
FPGA_DONE: R15.2 R18.1 R21.1 R29.1 U1.P10 | length 1426.8
  Top Layer w5: v1(4125.98,2944.88) 4157.48,2944.88 U1.P10@4173.23,2929.13 ; v2(4645.67,3128.61) 4639.13,3128.61 ccw(c4639.13,3116.45) 4626.97,3116.45 4626.97,3095.58 cw(c4621.97,3095.61) 4626.4,3093.3 ccw(c4643.63,3084.17) 4626.4,3075.05 cw(c4621.97,3072.73) 4626.97,3072.76 ccw(c4675.32,3072.76) 4641.13,3038.57 ccw(c4658.39,3055.84) 4658.39,3031.42 4815.89,3031.42 cw(c4815.89,2989.01) 4845.88,3019 4850.81,3014.08 cw(c4844.18,3007.45) 4853.55,3007.45
  Top Layer w6: R18.1@4902.56,2895.43 4902.56,2924.68 ccw(c4882.88,2924.68) 4882.88,2944.36 4871.5,2944.36 cw(c4871.5,2966.14) 4849.72,2966.14 v2(4849.72,2992.98) cw(c4878.96,2992.98) 4853.55,3007.45 cw(c4878.96,2992.98) 4878.96,3022.21 4988.19,3022.21 ccw(c4988.19,3043.87) 5009.84,3043.87 R15.2@5009.84,3060.63
  Top Layer w7: R29.1@4805.12,2926.43 R21.1@4805.12,2992.98 v2(4849.72,2992.98)
  Bottom Layer w5: v1(4125.98,2944.88) ccw(c4125.98,2991.96) 4159.26,2958.65 ccw(c4125.98,2991.96) 4159.32,2958.71 4260.41,3061.95 cw(c4306.56,3016.76) 4260.89,3062.43 4307.89,3109.43 cw(c4311.43,3105.91) 4308.63,3110.05 4310.19,3111.1 cw(c4312.99,3106.96) 4310.99,3111.54 4349.39,3128.2 cw(c4351.38,3123.61) 4351.38,3128.61 4518.58,3128.61 cw(c4518.58,3018.61) 4523.35,3128.51 4601.78,3125.11 ccw(c4602.63,3144.59) 4604.25,3125.16 v2(4645.67,3128.61)
FPGA_INITB: R16.2 R19.1 R20.1 U1.P7 | length 1347.6
  Top Layer w5: U1.P7@4267.72,2929.13 4267.72,2931.23 4268.76,2931.23 4281.9,2944.36 v1(4281.9,2945.41) ; v2(4643.63,3084.17) 4664.39,3084.17 cw(c4664.39,3070.41) 4678.15,3070.41 ccw(c4702.67,3070.41) 4702.67,3045.89 4829.15,3045.89 ccw(c4829.15,3070.41) 4853.67,3070.41 4853.67,3106.29 ccw(c4850.39,3106.29) v2(4850.39,3109.56) ; R20.1@4805.12,3108.89 4849.72,3108.89 v2(4850.39,3109.56) ; R19.1@5007.87,2895.43 ccw(c5007.87,2897.4) 5009.84,2897.4 R16.2@5009.84,2976.38 5009.84,2986.84 cw(c5042,2986.84) 5042,3019 ccw(c5042,3043.93) 5066.93,3043.93 5066.93,3090.9 ccw(c5045,3090.9) 5045,3112.83 4853.67,3112.83 ccw(c4853.67,3109.56) v2(4850.39,3109.56)
  Bottom Layer w5: v1(4281.9,2945.41) 4281.26,2946.05 cw(c4351.97,3016.76) 4251.97,3016.76 cw(c4306.56,3016.76) 4267.96,3055.36 4314.3,3101.7 cw(c4317.82,3098.15) 4315.83,3102.74 4351.47,3118.2 cw(c4353.45,3113.61) 4353.45,3118.61 4518.58,3118.61 cw(c4518.58,3018.61) 4589.29,3089.32 ccw(c4601.72,3101.75) 4601.72,3084.17 v2(4643.63,3084.17) cw(c4643.63,3081.29) v2@4645.67,3083.33
GND: C1.2 C2.2 C3.2 C4.2 C5.2 C6.2 C7.2 C8.2 C9.2 C10.2 C11.2 C12.2 C13.2 C14.2 C15.2 C16.2 C17.2 C18.2 C19.2 C20.2 C21.2 C22.2 C23.2 C24.2 C25.2 C26.2 C27.2 J1.1 J1.3 J1.5 J1.7 J1.9 J1.11 J1.13 MH1.1 MH2.1 P1.A1 P1.A2 P1.A8 P1.A20 P1.A27 P1.A28 P1.B3 P1.B9 P1.B15 P1.B21 P1.B22 R12.1 R13.1 R14.1 R23.2 U1.A2 U1.A12 U1.B5 U1.B15 U1.C8 U1.C18 U1.D1 U1.D11 U1.E4 U1.E14 U1.F7 U1.F9 U1.F11 U1.F17 U1.G8 U1.G10 U1.G12 U1.H3 U1.H7 U1.H9 U1.H11 U1.H13 U1.J6 U1.J8 U1.J12 U1.J16 U1.K7 U1.K11 U1.L2 U1.L8 U1.L12 U1.M5 U1.M7 U1.M9 U1.M11 U1.M15 U1.N8 U1.N10 U1.N12 U1.N18 U1.P1 U1.R4 U1.R14 U1.T7 U1.T17 U1.U10 U1.V3 U1.V13 U2.2 | length 5373.5
  Top Layer w8: v2(3872.49,2582.68) U1.C18@3921.26,2582.68 ; v1(3876.69,2897.64) U1.N18@3921.26,2897.64 ; v1(3937.02,2661.44) U1.F17@3952.76,2677.17 ; v1@3937.03,3007.85 U1.T17@3952.76,2992.13 ; v1(3968.5,2755.91) U1.J16@3984.25,2771.65 ; v1(4000,2535.43) U1.B15@4015.75,2551.18 ; v1(4000,2881.89) U1.M15@4015.75,2866.14 ; v1(4031.5,2629.92) U1.E14@4047.24,2645.67 ; v1(4031.5,2976.38) U1.R14@4047.24,2960.63 ; v1(4062.99,2724.41) U1.H13@4078.74,2740.16 U1.J12@4110.24,2771.65 U1.K11@4141.73,2803.15 ; U1.V13@4078.74,3055.12 4078.74,3095.32 cw(c4091,3095.32) v2(4091,3107.58) 4091,3108.89 ccw(c4088.59,3111.3) 4092,3111.3 C15.2@4092,3146.36 ; v1(4094.49,2850.39) U1.L12@4110.24,2834.65 ; v1(4110.24,2472.44) U1.A12@4110.24,2519.69 ; U1.G12@4110.24,2708.66 v1(4125.98,2724.41) U1.H11@4141.73,2740.16 ; U1.N12@4110.24,2897.64 v1(4125.98,2881.89) U1.M11@4141.73,2866.14 ; U1.D11@4141.73,2614.17 v1(4157.48,2598.43) ; U1.F11@4141.73,2677.17 U1.G10@4173.23,2708.66 ; v1(4157.48,2913.39) U1.N10@4173.23,2897.64 ; U1.U10@4173.23,3023.62 v1(4188.98,3039.37) ; U1.F9@4204.72,2677.17 U1.G10@4173.23,2708.66 ; U1.M9@4204.72,2866.14 v1(4220.47,2850.39) U1.L8@4236.22,2834.65 ; U1.C8@4236.22,2582.68 v1(4251.97,2566.93) ; U1.G8@4236.22,2708.66 v1(4251.97,2692.91) U1.F7@4267.72,2677.17 ; U1.J8@4236.22,2771.65 v1(4188.98,2724.41) U1.G10@4173.23,2708.66 ; U1.N8@4236.22,2897.64 v1(4251.97,2913.39) ; U1.K7@4267.72,2803.15 v1(4283.46,2787.4) ; U1.M7@4267.72,2866.14 v1(4283.46,2881.89) ; U1.T7@4267.72,2992.13 v1(4283.46,3007.87) ; v1(4283.46,2724.41) U1.H7@4267.72,2740.16 U1.J6@4299.21,2771.65 ; U1.B5@4330.71,2551.18 v1(4346.46,2535.43) ; U1.M5@4330.71,2866.14 v1(4346.46,2881.89) ; U1.E4@4362.2,2645.67 v1(4377.95,2629.92) ; U1.R4@4362.2,2960.63 v1(4377.95,2976.38) ; U1.H3@4393.7,2740.16 v1(4409.45,2755.91) ; U1.V3@4393.7,3055.12 v1(4393.7,3102.36) ; v1(4425,2481) 4425.2,2481.2 U1.A2@4425.2,2519.69 ; U1.L2@4425.2,2834.65 v1(4440.94,2850.39) ; U1.D1@4456.69,2614.17 v1(4496,2614.17) ; U1.P1@4456.69,2929.13 v1(4508.86,2929.13)
  Top Layer w10: v2(3837.71,2692.56) C13.2@3837.71,2722.05
  Top Layer w12: P1.B22@3997.05,3784.54 3997.05,3687.46 4006.52,3677.99 v1(4015.75,3677.99) 4028.38,3677.99 4036.42,3686.03 P1.B21@4036.42,3784.54
  Top Layer w20: C14.2@3570.08,2375.56 v2(3570.08,2409.45) ; C9.2@3653.54,2955.34 3653.54,2913.7 v2(3659.66,2919.81) ; C21.2@3752.2,2582.68 3752.68,2583.15 3752.68,2618.71 v2(3753.15,2619.18) ; v2(3753.15,2303.77) 3754.23,2303.77 3767.89,2317.43 3796.97,2317.43 C8.2@3801.73,2322.19 ; v2(3885.96,2323.53) cw(c3906.63,2302.87) C16.2@3906.63,2332.09 ; C17.2@3948.59,3168.11 v2(3948.59,3205.28) ; v1(4259.13,3672.77) ccw(c4226.51,3705.38) 4272.64,3705.38 P1.B15@4272.64,3784.54 ; v2(4372.01,3300.59) ccw(c4366.22,3306.37) 4374.4,3306.37 C1.2@4374.4,3330.71 ; C2.2@4438.77,3330.71 4439.24,3330.24 4439.24,3299.71 v2(4439.7,3299.25) ; v2(4526.76,2219.29) C18.2@4526.76,2266.02 ; P1.B9@4587.6,3784.54 4587.6,3666.4 ccw(c4602.63,3666.4) v2(4592,3655.77) ; v2(4598.43,2163) 4598.43,2157.48 cw(c4611.75,2144.16) 4611.75,2163 4643.63,2163 cw(c4643.63,2109.53) 4681.44,2147.34 4686.92,2141.86 ccw(c4756.25,2211.19) 4756.25,2113.14 J1.1@4790.35,2113.14 J1.3@4869.09,2113.14 J1.5@4947.83,2113.14 J1.7@5026.57,2113.14 J1.9@5105.31,2113.14 J1.11@5184.06,2113.14 J1.13@5262.8,2113.14 ccw(c5262.8,2195.11) 5320.75,2137.15 5323.09,2139.49 ccw(c5252.38,2210.2) 5352.38,2210.2 5352.38,2340.92 ccw(c5286.4,2340.92) 5333.05,2387.58 ccw(c5300.86,2355.38) 5300.86,2400.92 v2(5291.26,2400.92) ; C19.2@4634.58,2272.15 4637.18,2272.15 v2(4637.18,2241.32) ; v2(4692.91,3565.63) cw(c4690.54,3563.26) 4693.9,3563.26 C22.2@4693.9,3527.56 ccw(c4683.98,3537.47) C22.2@4698,3537.47 ; C12.2@4723.14,2438.93 v2(4756.34,2438.93) ; C20.2@4725.11,2645.67 v2(4756.34,2645.67) ; C11.2@4726.77,2740.16 v2(4756.34,2740.16) ; C7.2@4736.22,2535.43 v2(4771.65,2535.43) ; C6.2@4739.79,2845.11 v2(4778.17,2845.11) ; v2(4805.12,3615.38) ccw(c4759.97,3660.53) 4823.82,3660.53 P1.B3@4823.82,3784.54 ; C10.2@4850.39,3527.56 4850.62,3527.33 4882.65,3527.33 v2(4882.88,3527.11) ; C3.2@4899.7,3440.7 4937.81,3440.7 cw(c4937.81,3433.49) v2(4942.91,3438.59) ; C4.2@4901,3377.57 v2(4942.91,3377.57) ; C5.2@4901.37,3315.35 v2(4942.91,3315.35) ; v2(5224.41,2828.5) U2.2@5224.41,2877.53 ; v2(5283.46,2675.2) R23.2@5283.46,2722.44
  Bottom Layer w10: v2(3511.81,2949.27) cw(c3514.21,2946.88) 3514.21,2950.27 R12.1@3558.42,2950.27 ; v2(3511.81,3107.58) cw(c3514.95,3104.44) 3514.95,3108.89 R13.1@3558.42,3108.89 ; v2(3511.81,3275.59) R14.1@3557.43,3275.59
  Bottom Layer w12: P1.A20@4075.79,3784.54 4078.74,3707.87 v1(4078.74,3628.76) ; P1.A8@4626.97,3784.54 P1.A8@4627,3707.87 ; v1(4863,3608.49) 4863.46,3608.49 4881.62,3626.64 4882.71,3626.64 4900.1,3644.03 ccw(c4890,3650.5) 4902,3650.5 4902,3707.87 P1.A1@4902.56,3784.54 ; v1(4863,3647) 4863,3707.87 P1.A2@4863.19,3784.54
  Bottom Layer w20: P1.A28@3760.83,3784.54 3760.83,3732.99 ccw(c3860.83,3732.99) 3790.12,3662.28 3800.2,3652.2 ; P1.A27@3800.2,3784.54 3800.2,3652.2 ; v2(3828.1,3560.25) ccw(c3824,3556.15) 3824,3561.95 cw(c3881.47,3619.42) 3800.2,3619.42 3800.2,3652.2
  Bottom Layer w25: P1.A8@4626.97,3784.54 4626.97,3660.32 ccw(c4664.7,3660.32) 4638.02,3633.64 cw(c4638.02,3602.52) 4660.03,3624.52 4674.53,3610.02 cw(c4630.14,3565.63) v2(4692.91,3565.63)
  other v1: 3937.03,3007.87
  other v2: 5224.41,3045.89 5224.41,3093.3 5216.54,3154.47 5216.54,3226.32 5106.3,3506.37 5295.33,3506.37 5106.3,3702.11 5295.33,3702.11 3171.99,3776.59 3361.03,3776.59
GPIO1_TX: P1.B16 R21.2 U1.V10 | length 1536.4
  Top Layer w5: U1.V10@4173.23,3055.12 4173.23,3116.45 ccw(c4119.46,3116.45) 4157.48,3154.47 cw(c4164.61,3161.59) 4154.53,3161.59 4154.53,3527.11 ccw(c4149.53,3527.11) 4154.36,3528.4 4150.37,3543.33 ccw(c4111.48,3532.93) 4144.26,3556.29 4126.91,3580.64 cw(c4130.98,3583.54) 4125.98,3583.55 cw(c4193.32,3583.49) 4145.71,3631.1 4154.24,3639.64 cw(c4203.4,3590.48) 4203.4,3660 ccw(c4203.4,3681.21) 4218.4,3666.21 ccw(c4182.5,3702.11) 4233.27,3702.11 P1.B16@4233.27,3784.54
  Top Layer w6: v2(4690.55,2996.06) 4735.1,2996.06 R21.2@4738.19,2992.98
  Top Layer w8: v2(4690.55,2996.06) ccw(c4698,3003.52) v2@4698,2992.98
  Bottom Layer w6: v2(4173.23,3118.61) 4173.23,3119.18 4186.84,3132.78 cw(c4257.55,3062.07) 4257.55,3162.07 ; 4257.59,3162.07 4602.48,3164.59 cw(c4602.63,3144.59) 4604.92,3164.46 4624.48,3162.2 ccw(c4625.17,3168.16) 4625.02,3162.16 4625.14,3162.16 ccw(c4625.68,3188.18) 4642.05,3167.94 cw(c4645.84,3163.29) 4647.32,3169.11 cw(c4638.35,3133.87) 4661.94,3161.54 cw(c4636.29,3136.95) 4671.82,3136.95 4671.82,3041.27 ccw(c4735.76,3041.27) v2(4690.55,2996.06)
GPIO2_RX: P1.B17 U1.V11 | length 775
  Top Layer w5: U1.V11@4141.73,3055.12 4143.49,3123.1 ccw(c4124,3123.61) 4143.5,3123.69 4141.73,3532.91 ; 4141.73,3532.93 ccw(c4111.48,3532.93) 4132.87,3554.33 4128.2,3559 cw(c4159.68,3590.48) 4115.16,3590.48 cw(c4190.18,3590.48) 4137.13,3643.52 4158.51,3664.9 cw(c4173.23,3650.19) 4173.23,3671 ccw(c4173.23,3694.86) 4190.1,3677.99 ccw(c4180.94,3687.15) 4193.9,3687.15 P1.B17@4193.9,3784.54
GPIO3: P1.B18 R20.2 U1.V12 | length 1432.4
  Top Layer w5: U1.V12@4110.24,3055.12 4110.24,3094.17 cw(c4141.73,3094.17) 4119.46,3116.45 ccw(c4098.37,3137.54) 4128.2,3137.54 4128.2,3522.81 ccw(c4104.54,3522.81) 4121.27,3539.54 cw(c4124.82,3543.05) 4120.15,3541.26 4108.77,3570.97 cw(c4159.68,3590.48) 4105.16,3590.48 cw(c4190.18,3590.48) 4119.6,3637.88 4131.62,3655.77 cw(c4135.77,3652.99) 4132.25,3656.53 ccw(c4078.4,3710.35) 4154.53,3710.35 P1.B18@4154.53,3784.54
  Top Layer w8: v2(4692.91,3109.56) ccw(c4694.54,3111.19) 4694.54,3108.89 R20.2@4738.19,3108.89
  Bottom Layer w6: v2(4124,3123.61) 4152.2,3151.81 cw(c4222.91,3081.1) 4222.91,3181.1 4638.78,3181.1 4647.73,3180.29 cw(c4638.35,3133.87) 4669.05,3169.94 cw(c4661.94,3161.54) 4669.38,3169.64 4671.84,3167.4 4677.17,3162.07 cw(c4639.15,3124.05) 4692.91,3124.05 v2(4692.91,3109.56)
GPIO4: P1.B19 U1.V14 | length 747.6
  Top Layer w5: U1.V14@4047.24,3055.12 4047.24,3132.78 4047.24,3276.34 cw(c4147.24,3276.34) 4076.53,3347.05 ccw(c4033.19,3390.39) 4094.49,3390.39 4094.49,3614.97 cw(c4148.26,3614.97) 4110.24,3652.99 ccw(c4098.35,3664.87) 4115.16,3664.87 P1.B19@4115.16,3784.54
HDR1: P1.A9 U1.L1 | length 1400
  Top Layer w5: U1.L1@4456.69,2834.65 4483.34,2834.65 ccw(c4483.34,2934.65) 4554.05,2863.94 4554.54,2864.43 ccw(c4483.83,2935.14) 4583.83,2935.14 4583.13,3144.54 cw(c4602.63,3144.59) 4583.14,3145.19 4583.83,3167.47 ccw(c4578.83,3167.63) 4583.83,3167.63 ccw(c4483.83,3167.63) 4554.54,3238.34 ccw(c4495.39,3179.19) 4524.8,3257.5 cw(c4526.61,3262.16) 4523.91,3257.95 ccw(c4478.47,3188.76) 4480.44,3271.51 cw(c4480.6,3276.51) 4479.55,3271.62 ccw(c4453.59,3154.46) 4453.59,3274.46 4395.09,3274.46 cw(c4395.09,3279.47) 4395.01,3274.47 4366.48,3275.03 cw(c4366.58,3280.03) 4365.53,3275.14 4355.51,3277.3 cw(c4356.56,3282.18) 4354.47,3277.64 cw(c4392.15,3357.8) 4343.42,3283.84 cw(c4382.08,3322.49) 4327.41,3322.49 4327.41,3377.13 cw(c4427.41,3377.13) 4356.7,3447.84 cw(c4425.77,3378.77) 4425.77,3476.45 4452.03,3476.45 ccw(c4452.03,3576.45) 4522.74,3505.74 v1(4592,3575)
  Bottom Layer w5: P1.A9@4587.6,3784.54 4589.53,3704.37 ccw(c4594.52,3704.37) 4589.53,3704.29 4590.12,3679.43 cw(c4585.12,3679.29) 4586.56,3674.5 ccw(c4592,3655.77) 4588.04,3636.68 cw(c4587,3631.79) 4592,3631.82 v1(4592,3575)
HDR2: P1.A10 U1.M1 | length 1350.5
  Top Layer w5: U1.M1@4456.69,2866.14 4508.46,2866.14 ccw(c4508.46,2912.64) 4541.34,2879.76 ccw(c4470.63,2950.47) 4570.63,2950.47 4570.63,3147.42 ccw(c4460.63,3147.42) 4567.15,3174.87 cw(c4572,3176.08) 4567.06,3175.31 ccw(c4468.15,3160.58) 4538.86,3231.29 4529.93,3240.22 ccw(c4478.47,3188.76) 4478.47,3261.54 ccw(c4476.53,3256.93) 4477.67,3261.8 ccw(c4453.59,3154.46) 4453.59,3264.46 4375.15,3264.47 cw(c4375.04,3343.6) 4351.69,3267.99 4351.49,3268.05 cw(c4352.97,3272.83) 4350.97,3268.24 cw(c4392.15,3357.8) 4322.45,3288.1 cw(c4346.87,3312.52) 4312.33,3312.52 4312.33,3416.47 cw(c4317.33,3416.32) 4312.44,3417.36 4312.45,3417.43 cw(c4399.92,3396.23) 4327.66,3449.88 cw(c4331.65,3446.87) 4327.8,3450.06 4343,3465.26 cw(c4410.19,3398.07) 4410.19,3493.09 4434.67,3493.09 ccw(c4434.67,3593.09) 4505.38,3522.38 v1(4558,3575)
  Bottom Layer w5: 4548.23,3668.85 cw(c4543.23,3668.91) 4547.71,3666.69 4535.66,3642.46 ccw(c4553.13,3633.8) 4537.22,3622.53 4557.07,3594.61 cw(c4553,3591.71) 4558,3591.71 v1(4558,3575) ; 4548.23,3668.88 P1.A10@4548.23,3784.54
HDR3: P1.A11 U1.N1 | length 1289.7
  Top Layer w5: U1.N1@4456.69,2897.64 4518.75,2897.64 ccw(c4518.75,2926.43) 4539.11,2906.07 ccw(c4487.15,2958.03) 4560.63,2958.03 4560.63,3147.42 ccw(c4460.63,3147.42) 4531.34,3218.13 4524.34,3225.14 ; 4524.31,3225.16 ccw(c4520.81,3221.59) 4523.39,3225.87 4503.29,3237.94 ccw(c4446.56,3143.7) 4468.69,3251.45 4454.6,3254.36 ccw(c4453.59,3249.46) 4453.59,3254.46 4375.1,3254.46 ccw(c4375.04,3249.46) 4375.04,3254.47 cw(c4375.04,3343.6) 4312.01,3280.57 cw(c4341.18,3309.75) 4299.92,3309.75 4299.92,3396.23 cw(c4399.92,3396.23) 4329.21,3466.95 4345.75,3483.49 cw(c4401,3428.24) 4401,3506.37 4414.46,3506.37 ccw(c4414.46,3606.37) 4485.17,3535.66 v1(4524.51,3575)
  Bottom Layer w5: P1.A11@4508.86,3784.54 4508.86,3685.76 ccw(c4542.06,3685.76) 4518.58,3662.28 cw(c4504.27,3647.96) 4524.51,3647.96 cw(c4519.51,3647.96) 4524.5,3647.62 4523.7,3635.8 ccw(c4553.13,3633.8) 4523.63,3633.35 v1(4524.51,3575)
HDR4: P1.A12 U1.T1 | length 1064.2
  Top Layer w5: v1(4390.62,3583.5) 4390.62,3569.04 cw(c4355.09,3569.04) 4380.21,3543.92 cw(c4362.37,3561.76) 4362.37,3536.53 ccw(c4362.37,3489.68) 4329.25,3522.81 4291.8,3485.37 ccw(c4337.27,3439.9) 4272.97,3439.9 4272.97,3303.26 ccw(c4345.3,3303.26) 4294.16,3252.11 ccw(c4364.87,3322.82) 4364.87,3222.82 4417.33,3222.82 cw(c4417.33,3122.82) 4488.04,3193.53 4495.23,3186.34 cw(c4424.51,3115.63) 4524.51,3115.63 4524.51,3039.37 cw(c4486.27,3039.37) 4513.31,3012.33 4508.86,3007.87 cw(c4470.84,3045.89) 4470.84,2992.13 U1.T1@4456.69,2992.13
  Bottom Layer w5: v1(4390.62,3583.5) 4390.75,3583.63 P1.A12@4390.75,3784.54